# Allegro board DAQ_CONTROLLER.brd
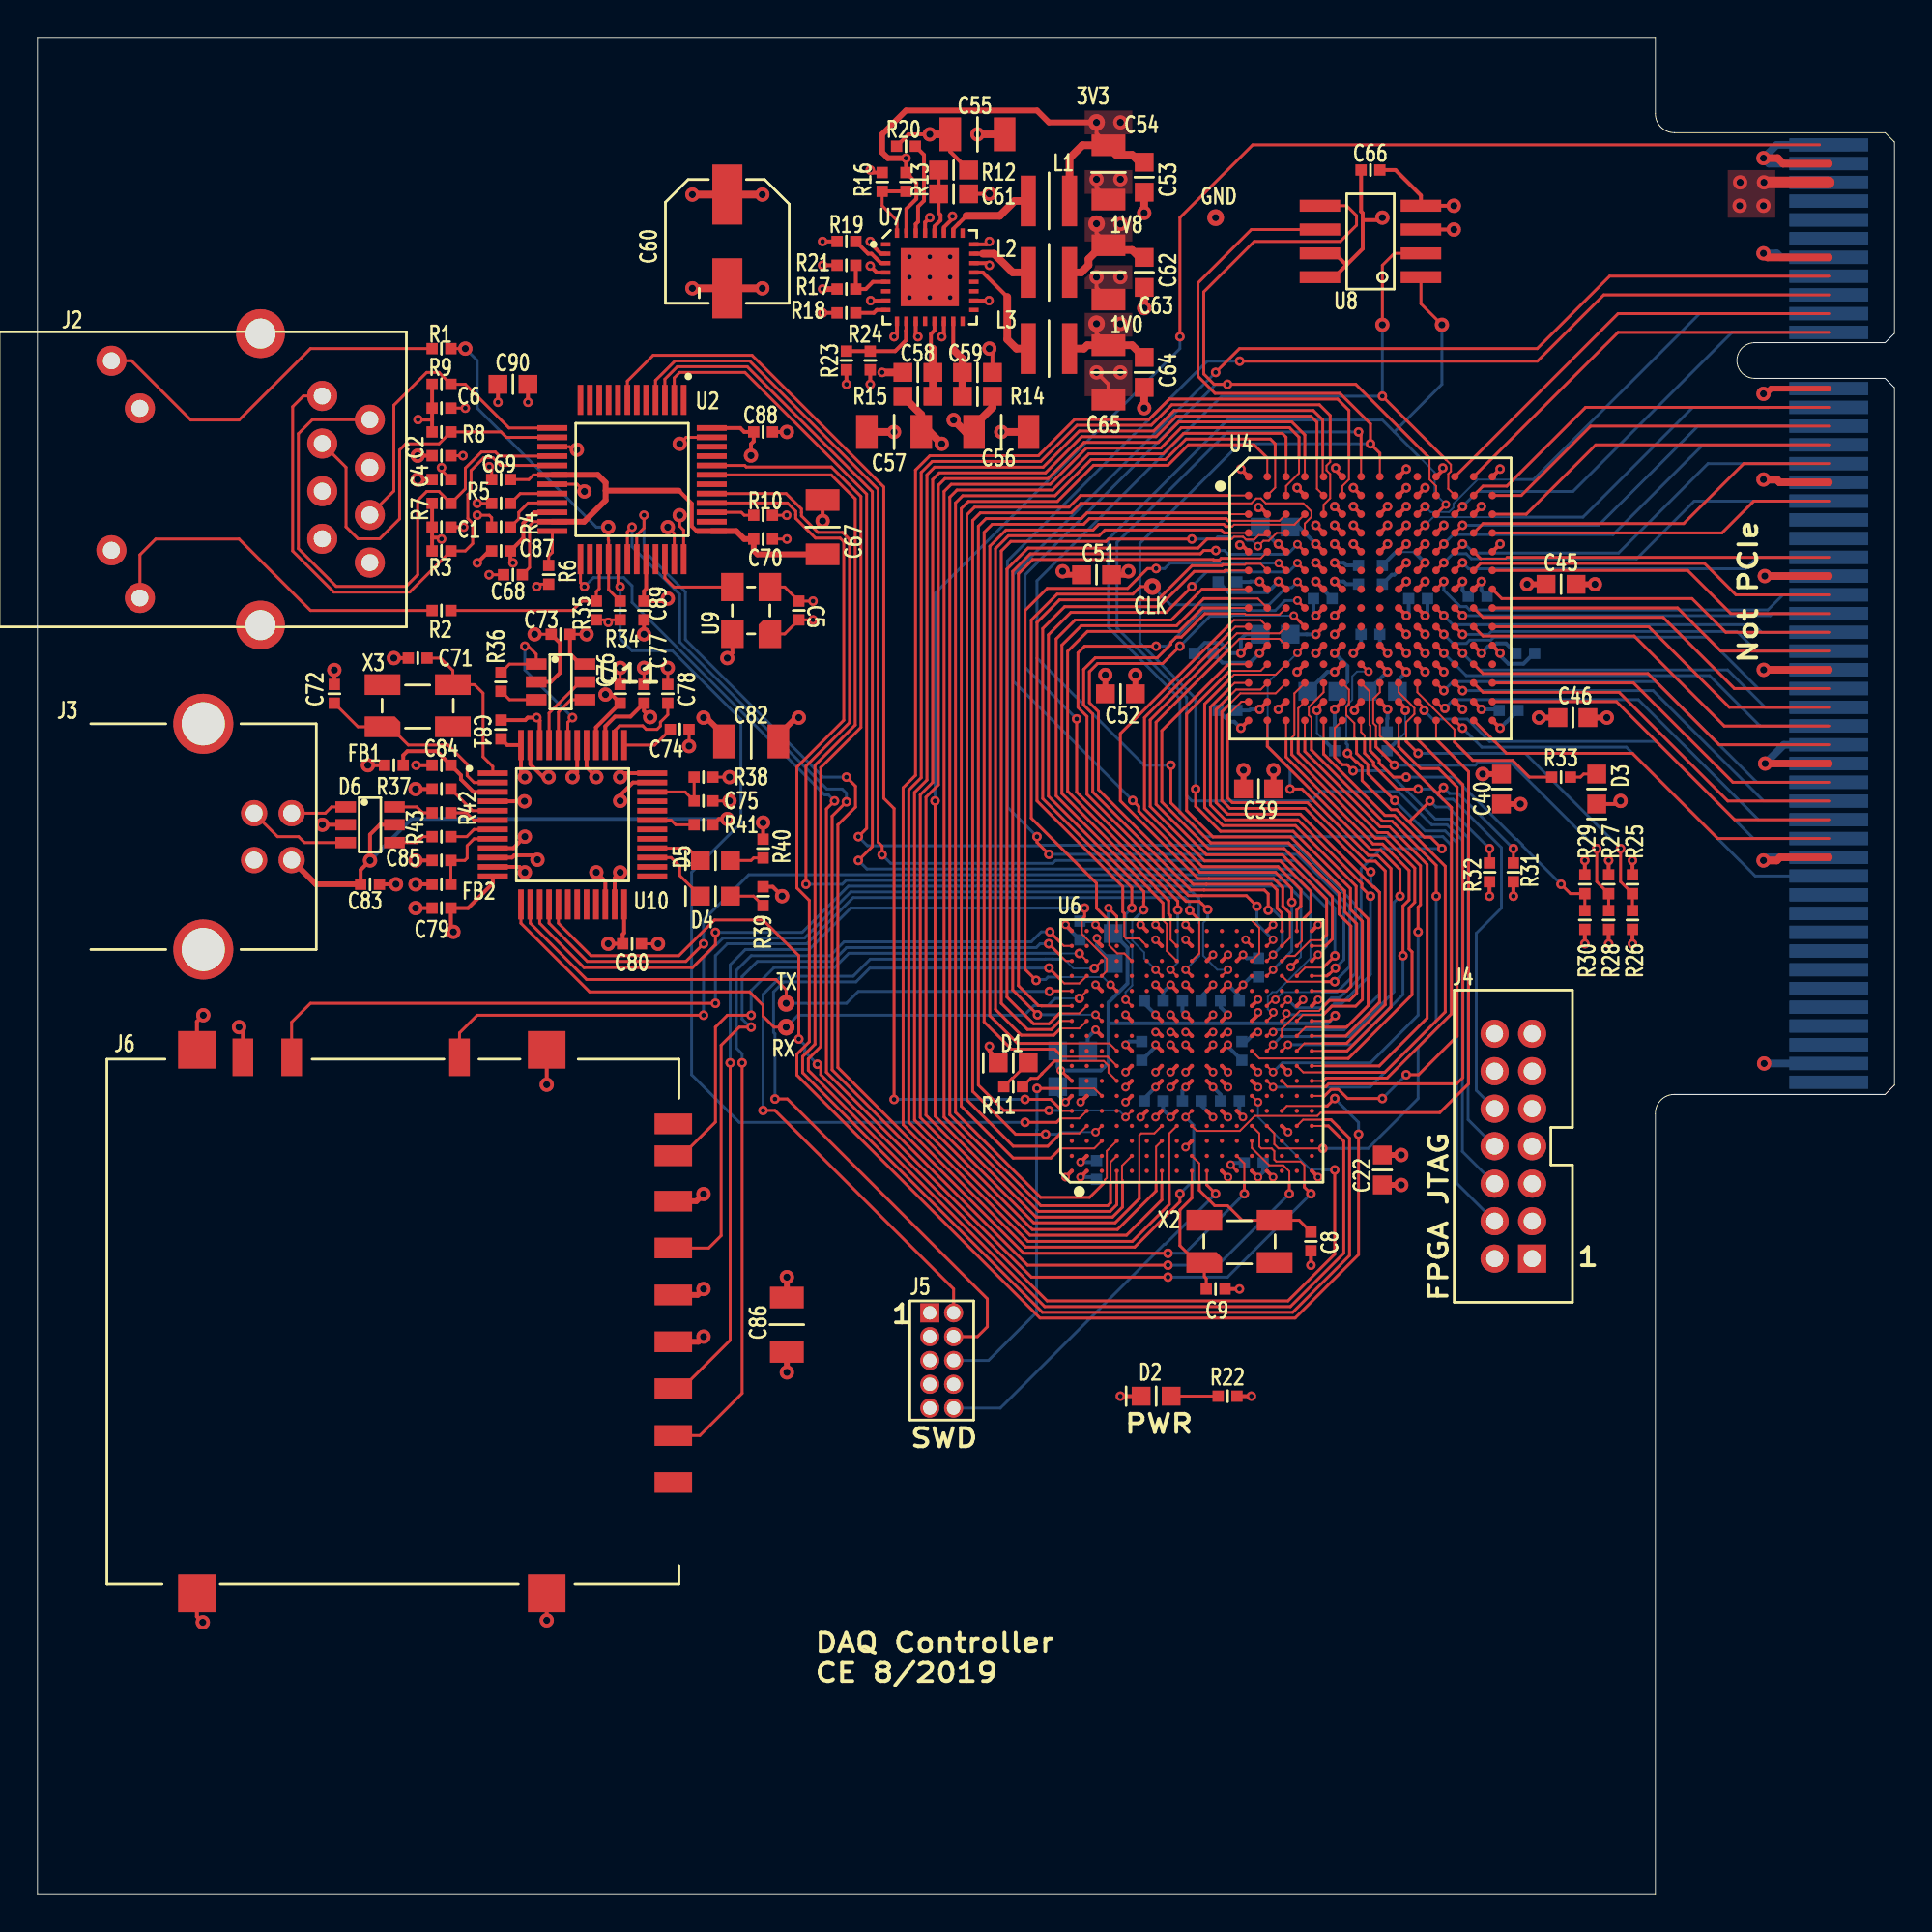
[diagram p0: board, top side]
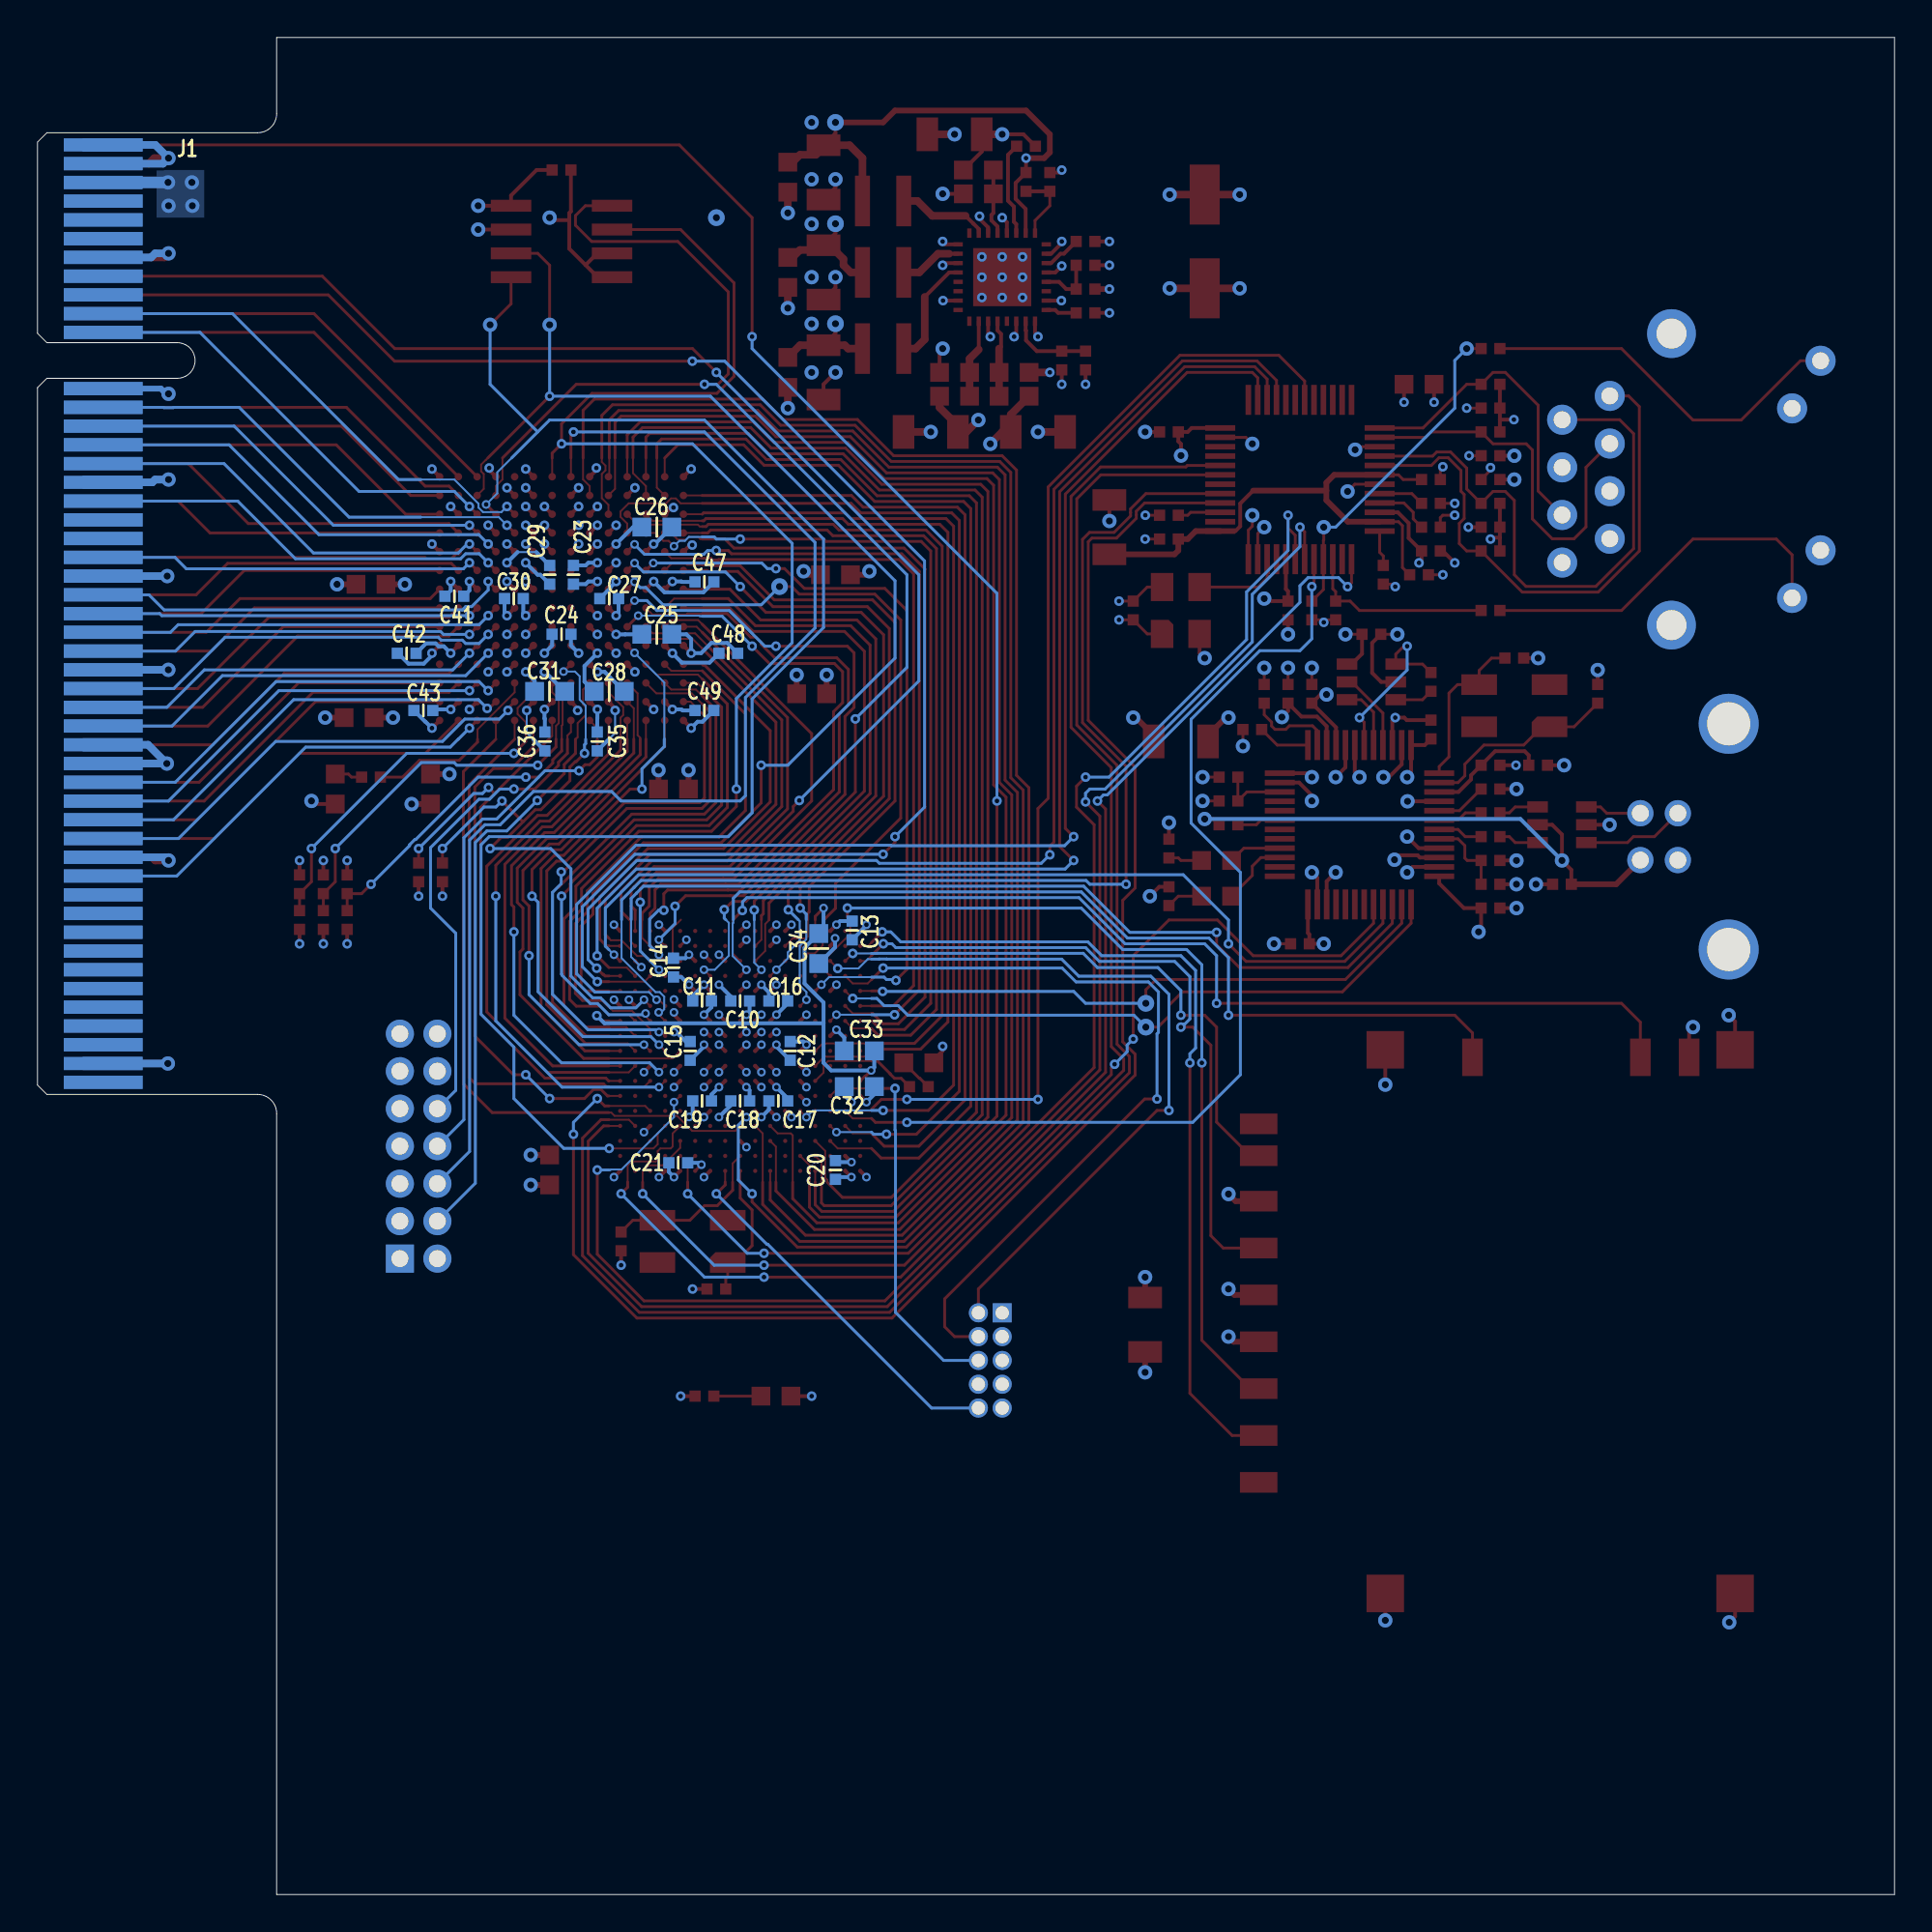
[diagram p1: board, bottom side, seen from below]

Outline 99.01 x 99.06 mm; copper layers: TOP, GND, PWR, BOTTOM. Coordinates in mm from the lower left corner of the outline.
Outline path: 0,99.06 0,0 86.26,0 86.26,41.66 arc(86.56,42.38) 87.28,42.68 98.51,42.68 99.01,43.18 99.01,80.38 98.51,80.88 91.56,80.88 arc(90.61,81.83) 91.56,82.78 98.51,82.78 99.01,83.28 99.01,93.48 98.51,93.98 87.28,93.98 arc(86.56,94.28) 86.26,95 86.26,99.06 0,99.06

## Design rules (mm)
constraint set DEFAULT: min track width 0.152
net group POWER: nets 12V0 AVIN1 AVIN2 AVIN3 VBUS VPHY VPLL

## Placement (name value [footprint] x y rotation side)
C1  0.1uF  [CAP_0402]  21.54 72.94 0 top
C2  0.1uF  [CAP_0402]  21.54 76.75 0 top
C4  0.1uF  [CAP_0402]  21.54 75.48 0 top
C5  0.1uF  [CAP_0402]  40.59 68.49 270 top
C6  0.1uF  [CAP_0402]  21.54 79.29 0 top
C8  8pF  [CAP_0402]  67.89 34.84 90 top
C9  8pF  [CAP_0402]  62.81 32.3 0 top
C10  0.1uF  [CAP_0402]  61.54 47.67 180 bottom
C11  0.1uF  [CAP_0402]  63.58 47.67 180 bottom
C12  0.1uF  [CAP_0402]  58.88 45 270 bottom
C13  0.1uF  [CAP_0402]  55.58 51.43 270 bottom
C14  0.1uF  [CAP_0402]  65.1 49.44 90 bottom
C15  0.1uF  [CAP_0402]  64.21 45 270 bottom
C16  0.1uF  [CAP_0402]  59.51 47.67 180 bottom
C17  0.1uF  [CAP_0402]  59.51 42.33 180 bottom
C18  0.1uF  [CAP_0402]  61.54 42.33 180 bottom
C19  0.1uF  [CAP_0402]  63.58 42.33 180 bottom
C20  0.1uF  [CAP_0402]  56.46 38.65 90 bottom
C21  0.1uF  [CAP_0402]  64.85 39.03 0 bottom
C22  4.7uF  [CAP_0603]  71.7 38.65 90 top
C23  1uF  [CAP_0402]  70.43 70.4 270 bottom
C24  1uF  [CAP_0402]  71.07 67.22 180 bottom
C25  4.7uF  [CAP_0603]  65.99 67.22 180 bottom
C26  4.7uF  [CAP_0603]  65.99 72.94 180 bottom
C27  1uF  [CAP_0402]  68.53 69.13 180 bottom
C28  4.7uF  [CAP_0603]  68.53 64.18 180 bottom
C29  1uF  [CAP_0402]  71.7 70.4 270 bottom
C30  1uF  [CAP_0402]  73.61 69.13 180 bottom
C31  4.7uF  [CAP_0603]  71.7 64.18 180 bottom
C32  4.7uF  [CAP_0603]  55.19 43.09 0 bottom
C33  2.2uF  [CAP_0603]  55.19 45 0 bottom
C34  2.2uF  [CAP_0603]  57.35 50.46 270 bottom
C35  1uF  [CAP_0402]  69.16 61.51 270 bottom
C36  1uF  [CAP_0402]  71.96 61.51 270 bottom
C39  4.7uF  [CAP_0603]  65.1 58.97 0 top
C40  4.7uF  [CAP_0603]  78.05 58.97 270 top
C41  1uF  [CAP_0402]  76.78 69.26 180 bottom
C42  1uF  [CAP_0402]  79.32 66.21 0 bottom
C43  1uF  [CAP_0402]  78.44 63.16 0 bottom
C45  4.7uF  [CAP_0603]  81.23 69.89 0 top
C46  4.7uF  [CAP_0603]  81.86 62.78 0 top
C47  1uF  [CAP_0402]  63.45 70.02 180 bottom
C48  1uF  [CAP_0402]  62.18 66.21 180 bottom
C49  1uF  [CAP_0402]  63.45 63.16 180 bottom
C51  4.7uF  [CAP_0603]  56.46 70.4 0 top
C52  4.7uF  [CAP_0603]  57.73 64.05 0 top
C53  0.1uF  [CAP_0603]  59 91.61 270 top
C54  4.7uF  [CAP_1206]  57.1 91.86 270 top
C55  4.7uF  [CAP_1206]  50.11 93.89 0 top
C56  4.7uF  [CAP_1206]  51.38 78.02 0 top
C57  4.7uF  [CAP_1206]  45.67 78.02 180 top
C58  0.1uF  [CAP_0603]  46.94 81.19 180 top
C59  0.1uF  [CAP_0603]  50.11 81.19 0 top
C60  220uF  [CAP_ALU_SMD_M6P6X8]  36.78 88.18 90 top
C61  0.1uF  [CAP_0603]  48.84 90.72 0 top
C62  0.1uF  [CAP_0603]  59 86.53 270 top
C63  4.7uF  [CAP_1206]  57.1 86.53 270 top
C64  0.1uF  [CAP_0603]  59 81.19 270 top
C65  4.7uF  [CAP_1206]  57.1 81.19 270 top
C66  0.1uF  [CAP_0402]  71.07 91.99 0 top
C67  10uF  [CAP_1206]  41.86 72.94 90 top
C68  0.1uF  [CAP_0402]  25.35 70.4 180 top
C69  0.1uF  [CAP_0402]  24.71 75.48 180 top
C70  0.1uF  [CAP_0402]  38.68 72.3 0 top
C71  27pF  [CAP_0402]  20.27 65.95 180 top
C72  27pF  [CAP_0402]  15.82 64.05 270 top
C73  0.1uF  [CAP_0402]  27.89 67.22 180 top
C74  0.1uF  [CAP_0402]  34.24 62.14 180 top
C75  0.1uF  [CAP_0402]  35.51 58.33 0 top
C76  0.1uF  [CAP_0402]  31.06 64.05 90 top
C77  0.1uF  [CAP_0402]  32.33 64.05 90 top
C78  0.1uF  [CAP_0402]  33.6 64.05 90 top
C79  0.1uF  [CAP_0402]  21.54 52.62 180 top
C80  0.1uF  [CAP_0402]  31.7 50.71 0 top
C81  0.1uF  [CAP_0402]  24.71 62.14 270 top
C82  10uF  [CAP_1206]  38.05 61.51 0 top
C83  0.1uF  [CAP_0402]  17.73 53.89 0 top
C84  0.1uF  [CAP_0402]  21.54 60.24 180 top
C85  0.1uF  [CAP_0402]  21.54 55.16 180 top
C86  10uF  [CAP_1206]  39.95 30.39 90 top
C87  0.1uF  [CAP_0402]  24.71 71.67 180 top
C88  0.1uF  [CAP_0402]  38.68 78.02 0 top
C89  0.1uF  [CAP_0402]  32.33 68.49 270 top
C90  4.7uF  [CAP_0603]  25.35 80.56 0 top
D1  USER  [LED_0603]  52.02 44.36 0 top
D2  PWR  [LED_0603]  59.64 26.58 0 top
D3  USER  [LED_0603]  83.13 58.97 90 top
D4  RX  [LED_0603]  36.14 53.25 0 top
D5  TX  [LED_0603]  36.14 55.16 0 top
D6  USBLC6-2  [SOT-23_6]  17.73 57.06 0 top
FB1  FB_0402  [CAP_0402]  19 60.24 0 top
FB2  FB_0402  [CAP_0402]  21.54 53.89 0 top
J1  DAQ_EDGE_98  [EDGE_PCIE_98]  99.01 81.83 270 bottom
J2  RJ45_MAG_RJMG1B  [MAGJACK_RJMG]  8.84 75.48 270 top
J3  USB_B  [USB_B_UE27BC54130]  8.84 56.43 270 top
J4  XILINX_JTAG  [HDR_2X7_2MM]  78.69 39.92 180 top
J5  SWD_HEADER  [HDR_0P5IN_2X5]  48.21 28.49 0 top
J6  SD_DM1AA  [SD_DM1AA-SF-PEJ]  31.7 42.46 270 top
L1  1uH  [IND_NR3015]  53.92 90.34 0 top
L2  1uH  [IND_NR3015]  53.92 86.53 0 top
L3  1uH  [IND_NR3015]  53.92 82.46 0 top
NOREF  -  []  -119.43 -17.23 0 top
NOREF#2  -  [unnamed#2]  5.08 91.44 0 top
NOREF#3  -  [unnamed#2]  5.08 7.62 0 top
R1  220  [RES_0402]  21.54 82.46 180 top
R2  220  [RES_0402]  21.54 68.49 180 top
R3  49.9  [RES_0402]  21.54 71.67 180 top
R4  2.2K  [RES_0402]  24.71 72.94 0 top
R5  2.2K  [RES_0402]  24.71 74.21 0 top
R6  4.87K  [RES_0402]  27.25 70.4 270 top
R7  49.9  [RES_0402]  21.54 74.21 0 top
R8  49.9  [RES_0402]  21.54 78.02 180 top
R9  49.9  [RES_0402]  21.54 80.56 0 top
R10  2.2K  [RES_0402]  38.68 73.57 0 top
R11  220  [RES_0402]  52.02 43.09 0 top
R12  51  [RES_0603]  48.84 91.99 180 top
R13  309K  [RES_0402]  46.3 91.35 270 top
R14  51  [RES_0603]  50.11 79.92 180 top
R15  51  [RES_0603]  46.94 79.92 0 top
R16  71.5K  [RES_0402]  45.03 91.35 90 top
R17  301K  [RES_0402]  43.13 85.64 0 top
R18  100K  [RES_0402]  43.13 84.37 0 top
R19  100K  [RES_0402]  43.13 88.18 0 top
R20  100K  [RES_0402]  46.3 93.26 0 top
R21  158K  [RES_0402]  43.13 86.91 180 top
R22  220  [RES_0402]  63.45 26.58 0 top
R23  115K  [RES_0402]  43.13 81.83 90 top
R24  187K  [RES_0402]  44.4 81.83 270 top
R25  DNP  [RES_0402]  85.04 53.89 90 top
R26  0  [RES_0402]  85.04 51.98 90 top
R27  DNP  [RES_0402]  83.77 53.89 90 top
R28  0  [RES_0402]  83.77 51.98 90 top
R29  0  [RES_0402]  82.5 53.89 90 top
R30  DNP  [RES_0402]  82.5 51.98 90 top
R31  4.7k  [RES_0402]  78.69 54.52 270 top
R32  4.7k  [RES_0402]  77.42 54.52 270 top
R33  220  [RES_0402]  81.23 59.6 0 top
R34  2.2K  [RES_0402]  31.06 68.49 90 top
R35  2.2K  [RES_0402]  29.79 68.49 270 top
R36  2k  [RES_0402]  24.71 64.68 270 top
R37  12k  [RES_0402]  21.54 58.97 180 top
R38  10k  [RES_0402]  35.51 59.6 180 top
R39  220  [RES_0402]  38.68 53.25 90 top
R40  220  [RES_0402]  38.68 55.79 90 top
R41  33k  [RES_0402]  35.51 57.06 0 top
R42  33  [RES_0402]  21.54 57.7 180 top
R43  33  [RES_0402]  21.54 56.43 180 top
U2  DP83848  [QFP48]  31.7 75.48 270 top
U4  XC7S6_FTGB196  [BGA196_FTGB196]  71.07 69.13 0 top
U6  STM32H750_BGA240  [BGA265_0P8MM_STM32]  61.54 45 90 top
U7  MIC23450  [QFN32_5X5]  47.57 86.27 0 top
U8  MX25L3233FM1  [SOIC8]  71.07 88.18 180 top
U9  50 MHz  [CRYSTAL_3P2X2P5]  38.05 68.49 90 top
U10  FT232H  [QFP48]  28.52 57.06 0 top
U11  93LC56BT-I/OT  [SOT-23_6]  27.89 64.68 0 top
X2  25 MHz  [CRYSTAL_5X3]  64.08 34.84 180 top
X3  12 MHz  [CRYSTAL_5X3]  20.27 63.41 180 top

## Library data of the parts
C1 C2 C4-C6 C8-C36 C39-C43 C45-C49 C51-C59 C61-C90 = CAP NP
C60 = CAP POL
D1-D5 = LED
D6 = USBLC6-2
FB1 FB2 = FB_0402
J1 = DAQ_EDGE_98
J2 = RJ45_MAG_RJMG1B
J3 = USB_B
J4 = XILINX_JTAG
J5 = SWD_HEADER
J6 = SD_DM1AA
L1-L3 = INDUCTOR
R1-R43 = RESISTOR
U2 = DP83848
U4 = XC7S6_FTGB196
U6 = STM32H750_BGA240
U7 = MIC23450
U8 = MX25L3233FM1
U9 = OSC_3P2x2P5_50MHZ
U10 = FT232H
U11 = 93LC56BT-I/OT
X2 X3 = CRYSTAL_5X3_12MHZ

## Footprints (pads in the part's own frame, mm; a bottom-side part is the same pattern mirrored in y, then rotated)
BGA196_FTGB196
  round 0.4 smd: A1(-6.5,6.5) A2(-5.5,6.5) A3(-4.5,6.5) A4(-3.5,6.5) A5(-2.5,6.5) A6(-1.5,6.5) A7(-0.5,6.5) A8(0.5,6.5) A9(1.5,6.5) A10(2.5,6.5) A11(3.5,6.5) A12(4.5,6.5) A13(5.5,6.5) A14(6.5,6.5) B1(-6.5,5.5) B2(-5.5,5.5) B3(-4.5,5.5) B4(-3.5,5.5) B5(-2.5,5.5) B6(-1.5,5.5) B7(-0.5,5.5) B8(0.5,5.5) B9(1.5,5.5) B10(2.5,5.5) B11(3.5,5.5) B12(4.5,5.5) B13(5.5,5.5) B14(6.5,5.5) C1(-6.5,4.5) C2(-5.5,4.5) C3(-4.5,4.5) C4(-3.5,4.5) C5(-2.5,4.5) C6(-1.5,4.5) C7(-0.5,4.5) C8(0.5,4.5) C9(1.5,4.5) C10(2.5,4.5) C11(3.5,4.5) C12(4.5,4.5) C13(5.5,4.5) C14(6.5,4.5) D1(-6.5,3.5) D2(-5.5,3.5) D3(-4.5,3.5) D4(-3.5,3.5) D5(-2.5,3.5) D6(-1.5,3.5) D7(-0.5,3.5) D8(0.5,3.5) D9(1.5,3.5) D10(2.5,3.5) D11(3.5,3.5) D12(4.5,3.5) D13(5.5,3.5) D14(6.5,3.5) E1(-6.5,2.5) E2(-5.5,2.5) E3(-4.5,2.5) E4(-3.5,2.5) E5(-2.5,2.5) E6(-1.5,2.5) E7(-0.5,2.5) E8(0.5,2.5) E9(1.5,2.5) E10(2.5,2.5) E11(3.5,2.5) E12(4.5,2.5) E13(5.5,2.5) E14(6.5,2.5) F1(-6.5,1.5) F2(-5.5,1.5) F3(-4.5,1.5) F4(-3.5,1.5) F5(-2.5,1.5) F6(-1.5,1.5) F7(-0.5,1.5) F8(0.5,1.5) F9(1.5,1.5) F10(2.5,1.5) F11(3.5,1.5) F12(4.5,1.5) F13(5.5,1.5) F14(6.5,1.5) G1(-6.5,0.5) G2(-5.5,0.5) G3(-4.5,0.5) G4(-3.5,0.5) G5(-2.5,0.5) G6(-1.5,0.5) G7(-0.5,0.5) G8(0.5,0.5) G9(1.5,0.5) G10(2.5,0.5) G11(3.5,0.5) G12(4.5,0.5) G13(5.5,0.5) G14(6.5,0.5) H1(-6.5,-0.5) H2(-5.5,-0.5) H3(-4.5,-0.5) H4(-3.5,-0.5) H5(-2.5,-0.5) H6(-1.5,-0.5) H7(-0.5,-0.5) H8(0.5,-0.5) H9(1.5,-0.5) H10(2.5,-0.5) H11(3.5,-0.5) H12(4.5,-0.5) H13(5.5,-0.5) H14(6.5,-0.5) J1(-6.5,-1.5) J2(-5.5,-1.5) J3(-4.5,-1.5) J4(-3.5,-1.5) J5(-2.5,-1.5) J6(-1.5,-1.5) J7(-0.5,-1.5) J8(0.5,-1.5) J9(1.5,-1.5) J10(2.5,-1.5) J11(3.5,-1.5) J12(4.5,-1.5) J13(5.5,-1.5) J14(6.5,-1.5) K1(-6.5,-2.5) K2(-5.5,-2.5) K3(-4.5,-2.5) K4(-3.5,-2.5) K5(-2.5,-2.5) K6(-1.5,-2.5) K7(-0.5,-2.5) K8(0.5,-2.5) K9(1.5,-2.5) K10(2.5,-2.5) K11(3.5,-2.5) K12(4.5,-2.5) K13(5.5,-2.5) K14(6.5,-2.5) L1(-6.5,-3.5) L2(-5.5,-3.5) L3(-4.5,-3.5) L4(-3.5,-3.5) L5(-2.5,-3.5) L6(-1.5,-3.5) L7(-0.5,-3.5) L8(0.5,-3.5) L9(1.5,-3.5) L10(2.5,-3.5) L11(3.5,-3.5) L12(4.5,-3.5) L13(5.5,-3.5) L14(6.5,-3.5) M1(-6.5,-4.5) M2(-5.5,-4.5) M3(-4.5,-4.5) M4(-3.5,-4.5) M5(-2.5,-4.5) M6(-1.5,-4.5) M7(-0.5,-4.5) M8(0.5,-4.5) M9(1.5,-4.5) M10(2.5,-4.5) M11(3.5,-4.5) M12(4.5,-4.5) M13(5.5,-4.5) M14(6.5,-4.5) N1(-6.5,-5.5) N2(-5.5,-5.5) N3(-4.5,-5.5) N4(-3.5,-5.5) N5(-2.5,-5.5) N6(-1.5,-5.5) N7(-0.5,-5.5) N8(0.5,-5.5) N9(1.5,-5.5) N10(2.5,-5.5) N11(3.5,-5.5) N12(4.5,-5.5) N13(5.5,-5.5) N14(6.5,-5.5) P1(-6.5,-6.5) P2(-5.5,-6.5) P3(-4.5,-6.5) P4(-3.5,-6.5) P5(-2.5,-6.5) P6(-1.5,-6.5) P7(-0.5,-6.5) P8(0.5,-6.5) P9(1.5,-6.5) P10(2.5,-6.5) P11(3.5,-6.5) P12(4.5,-6.5) P13(5.5,-6.5) P14(6.5,-6.5)
BGA265_0P8MM_STM32
  round 0.225 smd: A1(-6.4,6.4) A2(-5.6,6.4) A3(-4.8,6.4) A4(-4,6.4) A5(-3.2,6.4) A6(-2.4,6.4) A7(-1.6,6.4) A8(-0.8,6.4) A9(0,6.4) A10(0.8,6.4) A11(1.6,6.4) A12(2.4,6.4) A13(3.2,6.4) A14(4,6.4) A15(4.8,6.4) A16(5.6,6.4) A17(6.4,6.4) B1(-6.4,5.6) B2(-5.6,5.6) B3(-4.8,5.6) B4(-4,5.6) B5(-3.2,5.6) B6(-2.4,5.6) B7(-1.6,5.6) B8(-0.8,5.6) B9(0,5.6) B10(0.8,5.6) B11(1.6,5.6) B12(2.4,5.6) B13(3.2,5.6) B14(4,5.6) B15(4.8,5.6) B16(5.6,5.6) B17(6.4,5.6) C1(-6.4,4.8) C2(-5.6,4.8) C3(-4.8,4.8) C4(-4,4.8) C5(-3.2,4.8) C6(-2.4,4.8) C7(-1.6,4.8) C8(-0.8,4.8) C9(0,4.8) C10(0.8,4.8) C11(1.6,4.8) C12(2.4,4.8) C13(3.2,4.8) C14(4,4.8) C15(4.8,4.8) C16(5.6,4.8) C17(6.4,4.8) D1(-6.4,4) D2(-5.6,4) D3(-4.8,4) D4(-4,4) D5(-3.2,4) D6(-2.4,4) D7(-1.6,4) D8(-0.8,4) D9(0,4) D10(0.8,4) D11(1.6,4) D12(2.4,4) D13(3.2,4) D14(4,4) D15(4.8,4) D16(5.6,4) D17(6.4,4) E1(-6.4,3.2) E2(-5.6,3.2) E3(-4.8,3.2) E4(-4,3.2) E5(-3.2,3.2) E6(-2.4,3.2) E7(-1.6,3.2) E8(-0.8,3.2) E9(0,3.2) E10(0.8,3.2) E11(1.6,3.2) E12(2.4,3.2) E13(3.2,3.2) E14(4,3.2) E15(4.8,3.2) E16(5.6,3.2) E17(6.4,3.2) F1(-6.4,2.4) F2(-5.6,2.4) F3(-4.8,2.4) F4(-4,2.4) F5(-3.2,2.4) F13(3.2,2.4) F14(4,2.4) F15(4.8,2.4) F16(5.6,2.4) F17(6.4,2.4) G1(-6.4,1.6) G2(-5.6,1.6) G3(-4.8,1.6) G4(-4,1.6) G5(-3.2,1.6) G7(-1.6,1.6) G8(-0.8,1.6) G9(0,1.6) G10(0.8,1.6) G11(1.6,1.6) G13(3.2,1.6) G14(4,1.6) G15(4.8,1.6) G16(5.6,1.6) G17(6.4,1.6) H1(-6.4,0.8) H2(-5.6,0.8) H3(-4.8,0.8) H4(-4,0.8) H5(-3.2,0.8) H7(-1.6,0.8) H8(-0.8,0.8) H9(0,0.8) H10(0.8,0.8) H11(1.6,0.8) H13(3.2,0.8) H14(4,0.8) H15(4.8,0.8) H16(5.6,0.8) H17(6.4,0.8) J1(-6.4,0) J2(-5.6,0) J3(-4.8,0) J4(-4,0) J5(-3.2,0) J7(-1.6,0) J8(-0.8,0) J9(0,0) J10(0.8,0) J11(1.6,0) J13(3.2,0) J14(4,0) J15(4.8,0) J16(5.6,0) J17(6.4,0) K1(-6.4,-0.8) K2(-5.6,-0.8) K3(-4.8,-0.8) K4(-4,-0.8) K5(-3.2,-0.8) K7(-1.6,-0.8) K8(-0.8,-0.8) K9(0,-0.8) K10(0.8,-0.8) K11(1.6,-0.8) K13(3.2,-0.8) K14(4,-0.8) K15(4.8,-0.8) K16(5.6,-0.8) K17(6.4,-0.8) L1(-6.4,-1.6) L2(-5.6,-1.6) L3(-4.8,-1.6) L4(-4,-1.6) L5(-3.2,-1.6) L7(-1.6,-1.6) L8(-0.8,-1.6) L9(0,-1.6) L10(0.8,-1.6) L11(1.6,-1.6) L13(3.2,-1.6) L14(4,-1.6) L15(4.8,-1.6) L16(5.6,-1.6) L17(6.4,-1.6) M1(-6.4,-2.4) M2(-5.6,-2.4) M3(-4.8,-2.4) M4(-4,-2.4) M5(-3.2,-2.4) M13(3.2,-2.4) M14(4,-2.4) M15(4.8,-2.4) M16(5.6,-2.4) M17(6.4,-2.4) N1(-6.4,-3.2) N2(-5.6,-3.2) N3(-4.8,-3.2) N4(-4,-3.2) N5(-3.2,-3.2) N6(-2.4,-3.2) N7(-1.6,-3.2) N8(-0.8,-3.2) N9(0,-3.2) N10(0.8,-3.2) N11(1.6,-3.2) N12(2.4,-3.2) N13(3.2,-3.2) N14(4,-3.2) N15(4.8,-3.2) N16(5.6,-3.2) N17(6.4,-3.2) P1(-6.4,-4) P2(-5.6,-4) P3(-4.8,-4) P4(-4,-4) P5(-3.2,-4) P6(-2.4,-4) P7(-1.6,-4) P8(-0.8,-4) P9(0,-4) P10(0.8,-4) P11(1.6,-4) P12(2.4,-4) P13(3.2,-4) P14(4,-4) P15(4.8,-4) P16(5.6,-4) P17(6.4,-4) R1(-6.4,-4.8) R2(-5.6,-4.8) R3(-4.8,-4.8) R4(-4,-4.8) R5(-3.2,-4.8) R6(-2.4,-4.8) R7(-1.6,-4.8) R8(-0.8,-4.8) R9(0,-4.8) R10(0.8,-4.8) R11(1.6,-4.8) R12(2.4,-4.8) R13(3.2,-4.8) R14(4,-4.8) R15(4.8,-4.8) R16(5.6,-4.8) R17(6.4,-4.8) T1(-6.4,-5.6) T2(-5.6,-5.6) T3(-4.8,-5.6) T4(-4,-5.6) T5(-3.2,-5.6) T6(-2.4,-5.6) T7(-1.6,-5.6) T8(-0.8,-5.6) T9(0,-5.6) T10(0.8,-5.6) T11(1.6,-5.6) T12(2.4,-5.6) T13(3.2,-5.6) T14(4,-5.6) T15(4.8,-5.6) T16(5.6,-5.6) T17(6.4,-5.6) U1(-6.4,-6.4) U2(-5.6,-6.4) U3(-4.8,-6.4) U4(-4,-6.4) U5(-3.2,-6.4) U6(-2.4,-6.4) U7(-1.6,-6.4) U8(-0.8,-6.4) U9(0,-6.4) U10(0.8,-6.4) U11(1.6,-6.4) U12(2.4,-6.4) U13(3.2,-6.4) U14(4,-6.4) U15(4.8,-6.4) U16(5.6,-6.4) U17(6.4,-6.4)
CAP_0402
  rect 0.6x0.6 smd: 1(-0.5,0) 2(0.5,0)
CAP_0603
  rect 1x1 smd: 1(-0.8,0) 2(0.8,0)
CAP_1206
  rect 1.15x1.8 smd: 1(-1.45,0) 2(1.45,0)
CAP_ALU_SMD_M6P6X8
  rect 3.2x1.6 smd: 1(-2.5,0) 2(2.5,0)
CRYSTAL_3P2X2P5
  custom 1.5x1.2 smd: 1(-1.25,-1)
  rect 1.5x1.2 smd: 2(1.25,-1) 3(1.25,1) 4(-1.25,1)
CRYSTAL_5X3
  custom 1.9x1.1 smd: 1(1.875,1.125)
  rect 1.9x1.1 smd: 2(-1.875,1.125) 3(-1.875,-1.125) 4(1.875,-1.125)
EDGE_PCIE_98
  rect 0.7x3.2 smd: A1(-11.5,4) B17(6.5,4) B31(20.5,4) B48(37.5,4)
  rect 0.7x4.2 smd: A2(-10.5,3.5) A3(-9.5,3.5) A4(-8.5,3.5) A5(-7.5,3.5) A6(-6.5,3.5) A7(-5.5,3.5) A8(-4.5,3.5) A9(-3.5,3.5) A10(-2.5,3.5) A11(-1.5,3.5) A12(1.5,3.5) A13(2.5,3.5) A14(3.5,3.5) A15(4.5,3.5) A16(5.5,3.5) A17(6.5,3.5) A18(7.5,3.5) A19(8.5,3.5) A20(9.5,3.5) A21(10.5,3.5) A22(11.5,3.5) A23(12.5,3.5) A24(13.5,3.5) A25(14.5,3.5) A26(15.5,3.5) A27(16.5,3.5) A28(17.5,3.5) A29(18.5,3.5) A30(19.5,3.5) A31(20.5,3.5) A32(21.5,3.5) A33(22.5,3.5) A34(23.5,3.5) A35(24.5,3.5) A36(25.5,3.5) A37(26.5,3.5) A38(27.5,3.5) A39(28.5,3.5) A40(29.5,3.5) A41(30.5,3.5) A42(31.5,3.5) A43(32.5,3.5) A44(33.5,3.5) A45(34.5,3.5) A46(35.5,3.5) A47(36.5,3.5) A48(37.5,3.5) A49(38.5,3.5) B1(-11.5,3.5) B2(-10.5,3.5) B3(-9.5,3.5) B4(-8.5,3.5) B5(-7.5,3.5) B6(-6.5,3.5) B7(-5.5,3.5) B8(-4.5,3.5) B9(-3.5,3.5) B10(-2.5,3.5) B11(-1.5,3.5) B12(1.5,3.5) B13(2.5,3.5) B14(3.5,3.5) B15(4.5,3.5) B16(5.5,3.5) B18(7.5,3.5) B19(8.5,3.5) B20(9.5,3.5) B21(10.5,3.5) B22(11.5,3.5) B23(12.5,3.5) B24(13.5,3.5) B25(14.5,3.5) B26(15.5,3.5) B27(16.5,3.5) B28(17.5,3.5) B29(18.5,3.5) B30(19.5,3.5) B32(21.5,3.5) B33(22.5,3.5) B34(23.5,3.5) B35(24.5,3.5) B36(25.5,3.5) B37(26.5,3.5) B38(27.5,3.5) B39(28.5,3.5) B40(29.5,3.5) B41(30.5,3.5) B42(31.5,3.5) B43(32.5,3.5) B44(33.5,3.5) B45(34.5,3.5) B46(35.5,3.5) B47(36.5,3.5) B49(38.5,3.5)
HDR_0P5IN_2X5
  rect 1.016x1.016 hole 0.711: 1(-0.635,2.54)
  round 1.016 hole 0.711: 2(0.635,2.54) 3(-0.635,1.27) 4(0.635,1.27) 5(-0.635,0) 6(0.635,0) 7(-0.635,-1.27) 8(0.635,-1.27) 9(-0.635,-2.54) 10(0.635,-2.54)
HDR_2X7_2MM
  rect 1.5x1.5 hole 0.9: 1(-1,6)
  round 1.5 hole 0.9: 2(1,6) 3(-1,4) 4(1,4) 5(-1,2) 6(1,2) 7(-1,0) 8(1,0) 9(-1,-2) 10(1,-2) 11(-1,-4) 12(1,-4) 13(-1,-6) 14(1,-6)
IND_NR3015
  rect 0.8x2.7 smd: 1(-1.1,0) 2(1.1,0)
LED_0603
  rect 1x1 smd: 1(-0.8,0) 2(0.8,0)
MAGJACK_RJMG
  round 0 hole 3.25 unplated: (-5.725,0) (5.705,0)
  round 1.6 hole 0.9: 1(-4.46,6.34) 2(-3.19,8.88) 3(-1.92,6.34) 4(-0.65,8.88) 5(0.62,6.34) 6(1.89,8.88) 7(3.16,6.34) 8(4.43,8.88) 11(6.315,-3.38) 12(3.775,-4.9) 13(-3.795,-3.38) 14(-6.335,-4.9)
  round 2.6 hole 1.6: 9(-7.785,3.05) 10(7.765,3.05)
QFN32_5X5
  rect 0.5x0.23 smd: 1(-2.35,1.75) 2(-2.35,1.25) 3(-2.35,0.75) 4(-2.35,0.25) 5(-2.35,-0.25) 6(-2.35,-0.75) 7(-2.35,-1.25) 8(-2.35,-1.75) 17(2.35,-1.75) 18(2.35,-1.25) 19(2.35,-0.75) 20(2.35,-0.25) 21(2.35,0.25) 22(2.35,0.75) 23(2.35,1.25) 24(2.35,1.75)
  rect 0.23x0.5 smd: 9(-1.75,-2.35) 10(-1.25,-2.35) 11(-0.75,-2.35) 12(-0.25,-2.35) 13(0.25,-2.35) 14(0.75,-2.35) 15(1.25,-2.35) 16(1.75,-2.35) 25(1.75,2.35) 26(1.25,2.35) 27(0.75,2.35) 28(0.25,2.35) 29(-0.25,2.35) 30(-0.75,2.35) 31(-1.25,2.35) 32(-1.75,2.35)
  rect 3.1x3.1 smd: 33(0,0)
QFP48
  rect 1.6x0.3 smd: 1(-4.25,2.75) 2(-4.25,2.25) 3(-4.25,1.75) 4(-4.25,1.25) 5(-4.25,0.75) 6(-4.25,0.25) 7(-4.25,-0.25) 8(-4.25,-0.75) 9(-4.25,-1.25) 10(-4.25,-1.75) 11(-4.25,-2.25) 12(-4.25,-2.75) 25(4.25,-2.75) 26(4.25,-2.25) 27(4.25,-1.75) 28(4.25,-1.25) 29(4.25,-0.75) 30(4.25,-0.25) 31(4.25,0.25) 32(4.25,0.75) 33(4.25,1.25) 34(4.25,1.75) 35(4.25,2.25) 36(4.25,2.75)
  rect 0.3x1.6 smd: 13(-2.75,-4.25) 14(-2.25,-4.25) 15(-1.75,-4.25) 16(-1.25,-4.25) 17(-0.75,-4.25) 18(-0.25,-4.25) 19(0.25,-4.25) 20(0.75,-4.25) 21(1.25,-4.25) 22(1.75,-4.25) 23(2.25,-4.25) 24(2.75,-4.25) 37(2.75,4.25) 38(2.25,4.25) 39(1.75,4.25) 40(1.25,4.25) 41(0.75,4.25) 42(0.25,4.25) 43(-0.25,4.25) 44(-0.75,4.25) 45(-1.25,4.25) 46(-1.75,4.25) 47(-2.25,4.25) 48(-2.75,4.25)
RES_0402
  rect 0.6x0.6 smd: 1(-0.5,0) 2(0.5,0)
RES_0603
  rect 1x1 smd: 1(-0.8,0) 2(0.8,0)
SD_DM1AA-SF-PEJ
  round 0 hole 1.3 unplated: (0,0) (22.4,0)
  rect 1.1x2 smd: 1(17.975,2.2) 2(15.475,2.2) 3(12.975,2.2) 4(10.475,2.2) 5(7.975,2.2) 6(5.475,2.2) 7(3.05,2.2) 8(1.35,2.2) 9(20.475,2.2)
  rect 2x1.1 smd: 10(-2.2,-9.2) 11(-2.2,-18.15) 12(-2.2,-20.75)
  rect 2x2 smd: 13(-2.6,-4.55) 14(-2.6,-23.2) 15(26.4,-23.2) 16(26.4,-4.55)
SOIC8
  rect 2.159x0.635 smd: 1(-2.692,1.905) 2(-2.692,0.635) 3(-2.692,-0.635) 4(-2.692,-1.905) 5(2.692,-1.905) 6(2.692,-0.635) 7(2.692,0.635) 8(2.692,1.905)
SOT-23_6
  rect 1.1x0.6 smd: 1(-1.3,0.95) 2(-1.3,0) 3(-1.3,-0.95) 4(1.3,-0.95) 5(1.3,0) 6(1.3,0.95)
unnamed#2
  round 0 hole 3.6: (0,0)
USB_B_UE27BC54130
  round 1.4 hole 0.9: 1(1.25,4.71) 2(-1.25,4.71) 3(-1.25,2.71) 4(1.25,2.71)
  round 3.2 hole 2.3: 5(-6.02,0) 6(6.02,0)

## Nets
3V3: J1.A4 J1.B4
12V0: J1.A5 J1.A6 J1.A19 J1.A20 J1.B5 J1.B6 J1.B19 J1.B20
AVIN1: C61.1 R12.2 U7.28
AVIN2: C59.1 R14.2 U7.15
AVIN3: C58.1 R15.2 U7.13
GND: C1.2 C2.2 C4.2 C5.1 C6.2 C8.1 C9.2 C10.2 C11.2 C12.2 C13.2 C14.2 C15.2 C16.2 C17.2 C18.2 C19.2 C20.2 C21.2 C22.2 C23.2 C24.2 C25.2 C26.2 C27.2 C28.2 C29.2 C30.2 C31.2 C32.2 C33.2 C34.2 C35.2 C36.2 C39.2 C40.2 C41.2 C42.2 C43.2 C45.2 C46.2 C47.2 C48.2 C49.2 C51.2 C52.2 C53.2 C54.2 C55.2 C56.2 C57.2 C58.2 C59.2 C60.2 C61.2 C62.2 C63.2 C64.2 C65.2 C66.2 C67.2 C68.2 C69.2 C70.2 C71.2 C72.1 C73.2 C74.1 C75.2 C76.2 C77.2 C78.2 C79.2 C80.2 C81.2 C82.2 C83.2 C84.2 C85.2 C86.1 C87.2 C88.2 C89.2 C90.2 D1.1(CATHODE) D2.1(CATHODE) D3.1(CATHODE) D6.2 J1.A2 J1.A7 J1.A12 J1.A17 J1.A22 J1.A27 J1.A32 J1.A37 J1.B1 J1.B2 J1.B7 J1.B12 J1.B17 J1.B22 J1.B27 J1.B31 J1.B32 J1.B37 J1.B48 J2.8 J2.9 J2.10 J2.12(YEL_C) J2.13 J3.4 J3.5 J3.6(SH2) J4.3 J4.5 J4.7 J4.9 J4.11 J4.13 J5.3 J5.5 J5.9 J6.3 J6.6 J6.12 J6.13 J6.14 J6.15 J6.16 R6.2 R16.2 R21.2 R24.2 R26.1 R28.1 R30.1 R34.1 R35.2 R37.2 U2.15 U2.19 U2.35 U2.36 U2.47 U4.A1 U4.A6 U4.A9 U4.A11 U4.A14 U4.B4 U4.B7 U4.B9 U4.B10 U4.C2 U4.C6 U4.C7 U4.C8 U4.C9 U4.C13 U4.D5 U4.D7 U4.D9 U4.D11 U4.E1 U4.E3 U4.E6 U4.E8 U4.E10 U4.E14 U4.F5 U4.F9 U4.G3 U4.G6 U4.G10 U4.G12 U4.H5 U4.H9 U4.J6 U4.J10 U4.K1 U4.K5 U4.K7 U4.K9 U4.K14 U4.L4 U4.L6 U4.L8 U4.L10 U4.L11 U4.N3 U4.N5 U4.N9 U4.N12 U4.P1 U4.P14 U6.A1 U6.A17 U6.B2 U6.B6 U6.C10 U6.C13 U6.C16 U6.E8 U6.G7 U6.G8 U6.G9 U6.G10 U6.G11 U6.G16 U6.H7 U6.H8 U6.H9 U6.H10 U6.H11 U6.J3 U6.J7 U6.J8 U6.J9 U6.J10 U6.J11 U6.J16 U6.J17 U6.K7 U6.K8 U6.K9 U6.K10 U6.K11 U6.K15 U6.L7 U6.L8 U6.L9 U6.L10 U6.L11 U6.L15 U6.M15 U6.N1 U6.N16 U6.P1 U6.R4 U6.R8 U6.T12 U6.U1 U6.U17 U7.2 U7.7 U7.11 U7.18 U7.22 U7.24 U7.33 U8.4 U9.2 U10.4 U10.9 U10.10 U10.11 U10.22 U10.23 U10.35 U10.36 U10.41 U10.42 U10.47 U10.48 U11.2
VBUS: C83.1 D6.5(VCC) J3.1 R41.2
VCC_1V0: C23.1 C24.1 C25.1 C26.1 C27.1 C28.1 C64.1 C65.1 L3.2 R23.1 U4.D6 U4.D8 U4.E5 U4.E7 U4.E9 U4.F6 U4.G5 U4.G9 U4.H6 U4.J5 U4.J9 U4.K6 U4.K8 U7.9
VCC_1V8: C29.1 C30.1 C31.1 C62.1 C63.1 L2.2 R17.1 U4.F10 U4.H10 U4.K10 U4.L9 U7.4
VCC_3V3: C1.1 C2.1 C4.1 C5.2 C6.1 C10.1 C11.1 C12.1 C13.1 C14.1 C15.1 C16.1 C17.1 C18.1 C19.1 C20.1 C21.1 C22.1 C32.1 C35.1 C36.1 C39.1 C40.1 C41.1 C42.1 C43.1 C45.1 C46.1 C47.1 C48.1 C49.1 C51.1 C52.1 C53.1 C54.1 C66.1 C73.1 C76.1 C77.1 C79.1 C80.1 C81.1 C82.1 C86.2 C87.1 C88.1 C89.1 C90.1 FB1.1 FB2.1 J2.4 J2.5 J4.2(VREF) J5.1(VTREF) J6.4 L1.2 R3.2 R4.1 R5.1 R7.1 R8.2 R9.1 R10.2 R13.1 R22.2 R25.2 R27.2 R29.2 R31.2 R32.2 R38.1 R39.2 R40.2 U2.22 U2.32 U2.48 U4.G2 U4.G13 U4.K2 U4.K13 U4.N2(VCCO_34#N2) U4.N6 U4.N7 U4.N8 U4.N13 U6.A6 U6.B1 U6.C17 U6.E6 U6.E7(PDR_ON) U6.E9 U6.E11 U6.F5 U6.F17 U6.G5 U6.G13 U6.G17 U6.H5 U6.H13 U6.J13 U6.K5 U6.K13 U6.L1 U6.L5 U6.L13 U6.M1 U6.M5 U6.M13 U6.N7 U6.N8 U6.N10 U6.N11 U6.N12 U6.P17 U6.U12 U7.31 U8.3(W\P\/SIO2) U8.7 U8.8 U9.1 U9.4(VCC) U10.12 U10.24 U10.39 U10.40(VREGIN) U10.46 U11.6(VCC)
VCC_5V0: C55.1 C56.1 C57.1 C60.1 J1.A3 J1.B3 R12.1 R14.1 R15.1 R18.1 R19.1 R20.1 U7.14 U7.27 U7.29
CFG_CLK: U4.A8 U6.T11 U8.6
CFG_CS: U4.C11 U6.P4 U8.1
CFG_MISO: U4.B12 U6.U13 U8.2
CFG_MOSI: U4.B11 U6.L14 U8.5
CS0: J1.B36 U4.N10
CS1: J1.B29 U4.K12
CS2: J1.B23 U4.G11
CS3: J1.B14 U4.D12
CS4: J1.A14 U4.B14
CS5: J1.A23 U4.F13
CS6: J1.A29 U4.J14
CS7: J1.A35 U4.N14
ETH_PWR_DN: U2.7 U6.A5
ETH_RESET: U2.29 U6.B5
FB1: R13.2 R16.1 U7.32
FB2: R17.2 R21.1 U7.5
FB3: R23.2 R24.1 U7.10
FMC_A0: U4.A4 U6.G4
FMC_A1: U4.B5 U6.G3
FMC_A2: U4.A5 U6.G1
FMC_A3: U4.C5 U6.H4
FMC_A4: U4.B6 U6.J5
FMC_A5: U4.P11 U6.J4
FMC_A6: U4.P10 U6.R7
FMC_A7: U4.M5 U6.P7
FMC_A8: U4.N4 U6.P8
FMC_A9: U4.P3 U6.R9
FMC_A10: U4.P5 U6.T8
FMC_A11: U4.P4 U6.U8
FMC_A12: U4.H2 U6.H16
FMC_A13: U4.G1 U6.H15
FMC_A14: U4.H1 U6.H14
FMC_A15: U4.F4 U6.G14
FMC_A16: U4.K3 U6.R15
FMC_A17: U4.J2 U6.R16
FMC_A18: U4.J4 U6.R17
FMC_A19: U4.B2 U6.D3
FMC_A20: U4.A3 U6.D2
FMC_A21: U4.B3 U6.D1
FMC_A22: U4.C1 U6.E5
FMC_A23: U4.A2 U6.C3
FMC_A24: U4.C4 U6.D9
FMC_A25: U4.C3 U6.D8
FMC_CLK: U4.D2 U6.B12
FMC_D0: U4.H4 U6.P16
FMC_D1: U4.H3 U6.P15
FMC_D2: U4.F3 U6.D13
FMC_D3: U4.F1 U6.E12
FMC_D4: U4.K4 U6.U9
FMC_D5: U4.N1 U6.T9
FMC_D6: U4.P2 U6.P9
FMC_D7: U4.M4 U6.N9
FMC_D8: U4.M3 U6.P10
FMC_D9: U4.L2 U6.R10
FMC_D10: U4.L3 U6.T10
FMC_D11: U4.M2 U6.U10
FMC_D12: U4.M1 U6.R11
FMC_D13: U4.L1 U6.U16
FMC_D14: U4.J1 U6.T17
FMC_D15: U4.J3 U6.T16
FMC_INT: U4.F2 U6.F16
FMC_NBL0: U4.D4 U6.C4
FMC_NBL1: U4.B1 U6.B4
FMC_NE1: U4.E4 U6.C11
FMC_NOE: U4.E2 U6.A12
FMC_NWAIT: U4.D1 U6.B11
FMC_NWE: U4.D3 U6.A11
FPGA_CLK: U4.G4 U6.E15
FPGA_DONE: U4.P9 U6.U6
FPGA_INIT_B: R31.1 U4.P8 U6.U7
FPGA_PROG_B: R32.1 U4.L7 U6.R12
I2C_SCL: J1.A8 U6.P14
I2C_SDA: J1.A9(SDA) U6.R14
INT0: J1.B38 U4.P12
INT1: J1.B30 U4.K11
INT2: J1.B24 U4.H12
INT3: J1.B15 U4.E11
INT4: J1.A15 U4.C14
INT5: J1.A24 U4.F14
INT6: J1.A30 U4.J13
INT7: J1.A36 U4.P13
LED_LINK: J2.14 R1.2
LED_SPD: J2.11 R2.2
MISO0: J1.B34 U4.M12
MISO1: J1.B26 U4.J12
MISO2: J1.B18 U4.F11
MISO3: J1.B11 U4.C12
MISO4: J1.A11 U4.A13
MISO5: J1.A18 U4.D14
MISO6: J1.A26 U4.H14
MISO7: J1.A33 U4.M14
MOSI0: J1.B33 U4.M11
MOSI1: J1.B25 U4.H11
MOSI2: J1.B16 U4.E12
MOSI3: J1.B10 U4.C10
MOSI4: J1.A10 U4.A12
MOSI5: J1.A16 U4.D13
MOSI6: J1.A25 U4.G14
MOSI7: J1.A31 U4.L13
PRSNT: J1.A1 U6.E2
RESET: J5.10 U6.K1
RMII_CRS_DV: U2.40 U6.R5
RMII_MDC: U2.31 U6.M2
RMII_MDIO: U2.30 U6.N3
RMII_REF_CLK: U2.25 U6.N4
RMII_RX_ER: U2.41 U6.P11
RMII_RXD0: U2.43 U6.T4
RMII_RXD1: U2.44 U6.U4
RMII_TX_EN: U2.2 U6.P12
RMII_TXD0: U2.3 U6.T14
RMII_TXD1: U2.4 U6.U14
SCK0: J1.B35 U4.N11
SCK1: J1.B28 U4.J11
SCK2: J1.B21 U4.F12
SCK3: J1.B13 U4.D10
SCK4: J1.A13 U4.B13
SCK5: J1.A21 U4.E13
SCK6: J1.A28 U4.H13
SCK7: J1.A34 U4.M13
SD_CARD_DET: J6.10 U6.J14
SD_CS: J6.1 U6.A16
SD_MISO: J6.7 U6.B15
SD_MOSI: J6.2 U6.C14
SD_SCK: J6.5 U6.A15
SD_WP_DET: J6.11(WP_DET) U6.J15
SW1: L1.1 U7.26
SW2: L2.1 U7.23
SW3: L3.1 U7.21(SW3)
UART_DTR: U6.N6 U10.17
UART_STM_CTS: U6.T15 U10.15
UART_STM_RTS: U6.U15 U10.16
UART_STM_RX: U6.B13 U10.13
UART_STM_TX: U6.A13 U10.14
VPHY: C84.1 FB1.2 U10.3
VPLL: C85.1 FB2.2 U10.8
N21610: R18.2 U7.8
N21618: R19.2 U7.3
N25488: J4.4 U4.M6
N25492: J4.8 U4.P6
N25504: J4.10 U4.P7
N25516: J4.6 U4.A7
N233110: J2.1 R3.1 U2.17
N233158: R1.1 R34.2 U2.28
N233162: R2.1 R35.1 U2.27
N233448: R6.1 U2.24
N233488: R4.2 U2.21
N233492: R5.2 U2.20
N233698: J2.2 R7.2 U2.16
N233790: J2.3 R8.1 U2.14
N233818: J2.6 R9.2 U2.13
N233858: U2.34 U9.3
N233942: R10.1 U2.39
N236994: R20.2 U7.30
N257466: C8.2 U6.J2 X2.3
N257498: C9.1 U6.J1 X2.1
N258814: D1.2 R11.1
N333133: C33.1 C34.1 U6.A7 U6.D17 U6.U11
N374940: R25.1 R26.2 U4.M9
N374954: R27.1 R28.2 U4.M8
N374958: R29.1 R30.2 U4.M7
N380752: D2.2 R22.1
N386744: R11.2 U6.D7
N387111: J5.4 U6.B14
N387191: J5.2 U6.C15
N387288: J5.6 U6.C6
N397722: C67.1 C68.1 C69.1 C70.1 U2.18 U2.23(PFBOUT) U2.37
N404101: C71.1 U10.1 X3.3
N404116: C72.2 U10.2 X3.1
N404507: R36.1 U10.43 U11.1
N404532: U10.44 U11.4
N404557: U10.45 U11.5
N404944: R36.2 U11.3
N405790: R37.1 U10.5
N405901: C74.2 U10.37
N406814: C75.1 R38.2 U10.34
N407884: C78.1 U10.38
N417901: R41.1 U10.31
N417908: D4.2 R39.1
N417912: D5.2 R40.1
N418780: D4.1(CATHODE) U10.27
N418787: D5.1(CATHODE) U10.28
N426816: D6.1 J3.2
N426829: D6.3 J3.3
N427030: R43.1 U10.7
N427034: R42.1 U10.6
N427101: D6.6 R42.2
N427113: D6.4 R43.2
N487401: D3.2 R33.2
N487405: R33.1 U4.M10

Pads without a net: J1 A38 A39 A40 A41 A42 A43 A44 A45 A46 A47 A48 A49 B8 B9 B39 B40 B41 B42 B43 B44 B45 B46 B47 B49; J2 7; J4 1 12 14; J5 7 8; J6 8 9; U2 1 5 6 8 9 10 11 12 26 33 38 42 45 46; U4 A10 B8 F7 F8 G7 G8 H7 H8 J7 J8 L5 L12 L14; U6 A2 A3 A4 A8 A9 A10 A14 B3 B7 B8 B9 B10 B16 B17 C1 C2 C5 C7 C8 C9 C12 D4 D5 D6 D10 D11 D12 D14 D15 D16 E1 E3 E4 E10 E13 E14 E16 E17 F1 F2 F3 F4 F13 F14 F15 G2 G15 H1 H2 H3 H17 K2 K3 K4 K14 K16 K17 L2 L3 L4 L16 L17 M3 M4 M14 M16 M17 N2 N5 N13 N14 N15 N17 P2 P3 P5 P6 P13 R1 R2 R3 R6 R13 T1 T2 T3 T5 T6 T7 T13 U2 U3 U5; U7 1 6 12 16 17 19 20 25; U10 18 19 20 21 25 26 29 30 32 33; X2 2 4; X3 2 4

## Via types
v1: diameter 0.508, hole 0.254, TOP to BOTTOM, 270 vias
v2: diameter 0.457, hole 0.254, TOP to BOTTOM, 115 vias
v3: diameter 0.889, hole 0.381, TOP to BOTTOM, 7 vias
v4: diameter 0.762, hole 0.381, TOP to BOTTOM, 122 vias

## Routing (per net, layer and track width the routed paths; a pad name or vN(x,y) marks a point on that pad's centre or on a via; arc(x,y) is an arc through that point)
AVIN1: length 3.5
  TOP w0.203: R12.2 C61.1 48.04,89.7 48.15,89.59 48.15,89.31 47.82,88.98 U7.28
AVIN2: length 4.2
  TOP w0.203: U7.15 48.82,82.41
  TOP w0.406: 48.82,82.41 49.31,81.92 C59.1 R14.2
AVIN3: length 4.1
  TOP w0.203: 47.74,82.46 47.64,82.57 47.64,83.24 47.82,83.43 U7.13
  TOP w0.406: R15.2 C58.1 47.74,82.46
GND: length 358
  TOP w0.152: C69.2 24.21,75.98 24.08,76.11 v1(24.08,76.16) ; C74.1 v4(34.74,61.26) ; U2.47 34.58,77.73 v4(34.24,77.38) ; C6.2 v1(22.81,79.29) ; R34.1 30.56,67.99 v1(30.43,67.86) 30.3,67.99 R35.2 ; C70.2 v1(39.95,72.3) ; v4(33.6,72.94) 33.95,72.59 U2.35 ; U2.15 28.37,77.23 28.52,77.08 28.52,77.07 v4(28.76,77.07) ; v4(34.24,73.57) 34.24,72.99 34.45,72.78 U2.36 ; v1(41.35,69) C5.1 39.84,69.74 U9.2 ; C68.2 v1(24.08,70.4) ; C73.2 v4(26.51,67.22) ; C4.2 21.6,75.92 21.6,76.06 v1(21.54,76.11) ; C75.2 v4(36.89,58.33) ; v4(29.16,74.84) 28.77,75.23 U2.19 ; C80.2 v4(33.08,50.71) ; C2.2 v1(22.68,76.75) ; C76.2 v4(31.06,65.43) ; R6.2 26.75,69.9 v1(26.62,69.77) ; C78.2 v4(33.6,65.43) ; C77.2 v4(32.33,65.43) ; U6.N16 v2(64.41,50.93)
  TOP w0.203: C63.2 56.46,85.71 v4(56.46,86.27) ; v1(46.94,83.1) 46.82,83.21 U7.11 ; R26.1 v1(85.04,50.71) ; U6.J16 v2(61.21,50.93) ; U6.L7 v2(63.48,43.07) ; v2(63.48,46) 63.35,46 U6.L10 ; C88.2 v4(39.95,78.02) ; v4(31.06,59.6) 31.28,59.81 U10.36 ; U4.J6 v1(69.16,67.22) ; C79.2 v4(20.16,52.62) ; v4(75.51,90.08) U8.4 73.76,90.63 72.4,91.99 C66.2 ; D3.1 84.24,58.17 v4(84.4,58.33) ; D2.1 v1(57.73,26.58) ; U4.D5 v1(68.16,73.04) ; v4(28.52,59.6) 28.77,59.85 U10.42 ; U6.B2 v2(55.61,39.07) ; U4.E14 v1(77.98,72.04) ; v2(60.41,46) 60.54,46 U6.H10 ; U6.C16 56.41,50.93 56.41,51.01 v2(56.49,51.01) ; U7.24 50.6,88.02 v1(50.75,88.18) ; U6.J11 v2(61.21,46.93) ; v4(25.98,54.52) 25.69,54.81 U10.11 ; U6.H11 v2(60.41,46.93) ; U4.B7 v1(70.16,75.04) ; U10.23 30.77,54.23 v4(31.06,54.52) ; U6.C13 v2(56.41,48.53) ; U6.P1 v2(65.88,38.27) ; v1(72.93,63.16) 72.93,63.27 U4.N9 ; v4(29.79,54.52) 30.28,54.04 U10.22 ; U4.H9 v1(72.98,68.22) ; U4.K7 v1(70.16,66.22) ; U6.A17 v2(54.81,51.73) ; U6.J10 61.34,46 v2(61.21,46) ; v1(44.4,88.18) 44.4,88.09 44.97,87.52 U7.2 ; U6.N1 v2(65.08,38.27) ; U6.H8 v2(60.41,43.87) ; U6.H7 v2(60.41,43.07) ; v4(31.06,58.33) 31.06,58.63 31.75,59.31 U10.35 ; U7.22 50.63,87.02 v1(50.75,86.91) ; U4.N3 v1(66.16,63.22) ; C71.2 v4(19,65.95) ; U4.E8 v1(71.98,72.04) ; U4.C6 v1(69.16,74.04) ; U4.E6 v1(69.16,72.04) ; U6.K7 v2(62.68,43.07) ; U4.A9 v1(72.98,76.04) ; U10.10 25.3,55.31 25.43,55.44 26.42,55.44 v4(26.66,55.2) ; U7.7 v1(44.42,85.02) ; U4.G12 v1(75.98,70.04) ; U6.H9 v2(60.41,45.33) ; v4(50.75,82.46) 50.92,82.3 C59.2 ; v1(68.21,63.16) 68.21,63.27 U4.N5 ; U4.L6 v1(69.16,65.22) ; U6.G16 v2(59.61,50.93) ; U4.C8 v1(71.98,74.04) ; C67.2 v4(41.86,73.27) ; U4.A6 69.21,75.99 v1(69.21,76.1) ; J6.14 8.5,46.56 v4(8.84,46.9) ; U6.J17 v2(61.21,51.73) ; J6.13 v4(27.15,43.2) ; C90.2 v1(26.15,79.6) ; v1(64.1,71.99) 64.21,71.99 U4.E1 ; U4.C2 65.21,73.99 v1(65.1,73.99) ; U4.L11 v1(74.98,65.22) ; U6.R8 v2(66.68,43.87) ; U4.F5 v1(68.16,71.04) ; C81.2 25.04,61.31 U10.48 25.77,59.81 v4(25.98,59.6) ; U4.L8 v1(71.98,65.22) ; U6.M15 v2(64.28,50.13) ; U6.U17 v2(68.28,51.73) ; U6.A1 v2(54.81,38.27) ; v1(44.4,91.99) 44.53,91.86 R16.2 ; U6.J3 v2(61.21,39.87) ; U6.K9 v2(62.68,45.33) ; U6.J9 v2(61.21,45.33) ; U4.C7 v1(70.16,74.04) ; C65.2 57.1,80.56 v4(56.46,81.19) ; U6.G9 v2(59.61,45.33) ; D1.1 51.22,44.53 50.75,45 v1(50.75,45.24) ; C54.2 56.46,91.05 v4(56.46,91.5) ; U11.2 27.37,64.68 27.85,65.17 27.85,66.76 C73.2 ; U6.G10 59.74,46 v2(59.61,46) ; C1.2 v1(22.72,72.94) ; U10.41 29.28,60.12 v4(29.79,59.6) ; R24.2 v1(44.4,80.56) ; U10.9 25.37,55.81 v4(25.98,56.43) ; U6.L11 v2(63.48,46.93) ; U4.A14 v1(77.98,76.04) ; U4.K1 v1(64.16,66.22) ; U4.P1 v1(64.16,62.22) ; U4.K5 v1(68.16,66.22) ; U6.G8 v2(59.61,43.87) ; U4.E3 v1(66.16,72.04) ; D6.2 v4(15.19,57.06) ; U6.R4 v2(66.68,40.67) ; C85.2 v4(20.16,55.16) ; U6.K8 v2(62.68,43.87) ; U4.B10 v1(73.98,75.04) ; v1(23.44,71.03) 24.08,71.67 C87.2 ; U6.U1 v2(68.28,38.27) ; U4.C13 v1(76.98,74.04) ; U4.G6 v1(69.16,70.04) ; U4.P14 v1(77.98,62.22) ; R28.1 v1(83.77,50.71) ; U6.K15 v2(62.68,50.13) ; U6.T12 v2(67.48,47.73) ; U4.N12 v1(75.98,63.22) ; U4.A11 74.93,75.99 v1(74.93,76.1) ; U4.B9 v1(72.98,75.04) ; R30.1 v1(82.5,50.71) ; U4.E10 v1(73.98,72.04) ; C83.2 v4(19.11,53.89) ; v4(8.81,14.52) 8.5,14.83 J6.15 ; C61.2 v4(50.75,90.72) ; R37.2 v4(20.16,58.97) ; U6.L15 v2(63.48,50.13) ; U6.C10 v2(56.41,46.13) ; U4.L10 v1(73.98,65.22) ; U4.K9 v1(72.98,66.22) ; J6.12 10.95,46.06 v4(10.74,46.27) ; v4(27.25,59.6) 26.96,59.6 26.28,60.29 U10.47 ; J6.16 v4(27.15,14.62) ; U6.K10 62.55,46 v2(62.68,46) ; U4.J10 v1(73.98,67.22) ; U6.L8 v2(63.48,43.87) ; U4.B4 v1(67.16,75.04) ; U4.H5 v1(68.16,68.22) ; U4.G10 v1(73.98,70.04) ; U7.18 v1(50.73,85.02) ; U4.D11 v1(74.98,73.04) ; U6.E8 v2(58.01,43.87) ; U6.K11 v2(62.68,46.93) ; U6.L9 v2(63.48,45.33) ; C9.2 v1(64.08,32.3) ; C72.1 v4(15.82,65.32) ; U4.K14 v1(77.98,66.22) ; U4.L4 v1(67.16,65.22) ; C8.1 v1(67.89,33.57) ; U4.D7 v1(70.16,73.04) ; U4.A1 v1(64.16,76.04) ; U6.B6 v2(55.61,42.27) ; U6.G11 v2(59.61,46.93) ; C84.2 v1(20.18,60.24) ; U4.F9 v1(72.98,71.04) ; U6.G7 v2(59.61,43.07) ; C89.2 v4(32.33,67.22) ; U4.D9 v1(72.98,73.04) ; U6.J7 v2(61.21,43.07) ; U4.G3 v1(66.16,70.04) ; U6.J8 v2(61.21,43.87) ; R21.2 v1(41.86,86.91) ; U4.C9 v1(72.98,74.04) ; U10.4 v4(25.96,58.31)
  TOP w0.305: C22.2 v4(72.71,39.45) ; J6.6 35.13,36.98 v4(35.51,37.37) ; v4(35.51,29.76) 35.23,29.48 J6.3 ; C45.2 v4(83.04,69.89) ; J1.A12 92.43,80.33 92.28,80.18 92.15,80.18 v4(92.02,80.05) ; C86.1 v4(39.95,27.85) ; C46.2 v4(83.67,62.78) ; C82.2 39.5,61.84 40.44,62.78 v4(40.59,62.78) ; C52.2 v4(58.54,65.06) ; v4(58.16,70.59) 57.98,70.4 C51.2 ; C39.2 v4(65.9,59.98) ; C40.2 v4(79.06,58.17)
  TOP w0.406: v4(92.02,55.16) 92.74,55.16 92.91,55.33 J1.A37 ; v4(92.02,75.48) 92.74,75.48 92.89,75.33 J1.A17 ; J1.A27 v4(92.03,65.33) ; C55.2 v4(50.11,93.89) ; J1.A7 92.24,87.33 v4(92.02,87.54) ; C56.2 v4(51.38,78.02) ; J1.A32 v4(92.11,60.33) ; C58.2 v1(45.03,81.19) ; C57.2 v4(45.67,78.02) ; v4(34.91,90.68) C60.2 v4(38.65,90.68) ; J1.A2 93.08,92.33 92.78,92.62 v4(92.02,92.62) ; C62.2 v4(59,84.62) ; J1.A22 v4(92.1,70.33) ; C64.2 v4(59,79.29) ; C53.2 v4(59,89.7)
  GND w0.203: J4.3 79.69,36.85 ; J4.3 80.62,35.92 ; J4.3 79.69,34.99 ; J4.3 78.76,35.92 ; 46.89,29.76 J5.3 ; 8.84,48.63 J3.6 ; J3.6 10.62,50.41 ; J3.6 7.06,50.41 ; J3.6 8.84,52.19 ; J4.11 80.62,43.92 ; J4.11 79.69,44.85 ; J4.11 78.76,43.92 ; J4.11 79.69,42.99 ; 2.96,71.7 J2.12 ; J2.12 3.94,70.73 ; J2.12 4.92,71.7 ; J2.12 3.94,72.68 ; 8.84,60.67 J3.5 ; J3.5 10.62,62.45 ; J3.5 7.06,62.45 ; J3.5 8.84,64.23 ; 10.41,67.71 J2.10 ; J2.10 11.89,66.24 ; J2.10 13.37,67.71 ; J2.10 11.89,69.19 ; 79.69,36.99 J4.5 ; J4.5 79.69,38.85 ; J4.5 78.76,37.92 ; J4.5 80.62,37.92 ; 17.72,70.07 J2.8 ; J2.8 18.7,71.05 ; J2.8 16.74,71.05 ; J2.8 17.72,72.03 ; 5.46,78.3 J2.13 ; J2.13 5.46,80.25 ; J2.13 4.48,79.27 ; J2.13 6.44,79.27 ; J4.7 80.62,39.92 ; J4.7 79.69,40.85 ; J4.7 79.69,38.99 ; J4.7 78.76,39.92 ; J4.9 80.62,41.92 ; J4.9 78.76,41.92 ; J4.9 79.69,42.85 ; J4.9 79.69,40.99 ; 11.89,81.79 J2.9 ; J2.9 13.37,83.27 ; J2.9 10.41,83.27 ; J2.9 11.89,84.74 ; 11.55,54.3 J3.4 ; J3.4 11.55,56.06 ; J3.4 10.67,55.18 ; J3.4 12.43,55.18 ; 46.89,25.95 J5.9 47.57,25.26 ; 46.89,28.49 J5.5 ; 79.69,44.99 J4.13 ; J4.13 79.69,46.85 ; J4.13 78.76,45.92 ; J4.13 80.62,45.92
  BOTTOM w0.102: 72.58,61.63 72.93,61.98 v1(72.93,63.16) ; 68.54,61.63 68.21,61.96 v1(68.21,63.16)
  BOTTOM w0.203: v2(61.21,43.07) 61.04,42.9 C18.2 ; v1(77.98,62.22) 78.32,62.56 78.34,62.56 C43.2 ; v1(64.16,62.22) 63.82,62.56 63.55,62.56 C49.2 ; C20.2 56.38,39.07 v2(55.61,39.07) ; C48.2 62.23,66.76 63.09,66.76 63.63,66.22 v1(64.16,66.22) 64.16,66.97 64.41,67.22 C25.2 ; v1(66.16,70.04) 65.58,69.46 63.5,69.46 C47.2 ; C16.2 59.01,47.53 v2(59.61,46.93) ; C28.2 68.77,65.22 v1(69.16,65.22) ; C21.2 65.35,38.54 v2(65.08,38.27) ; C32.2 56,42.65 v2(55.61,42.27) ; C23.2 69.78,69.9 69.64,70.04 v1(69.16,70.04) ; v2(64.28,50.13) 64.46,49.95 C14.2 ; C33.2 56,45.71 v2(56.41,46.13) ; v2(59.61,45.33) 59.61,45.24 C12.2 ; C30.2 73.11,68.35 v1(72.98,68.22) ; C19.2 63.08,42.67 v2(62.68,43.07) ; C10.2 61.04,47.1 v2(61.21,46.93) ; C34.2 56.49,50.53 v2(56.49,51.01) ; v2(63.48,46.93) 63.08,47.33 C11.2 ; C41.2 75.98,69.56 v1(75.98,70.04) ; C15.2 63.48,45.24 v2(63.48,45.33) ; C27.2 68.03,68.35 v1(68.16,68.22) ; v2(59.61,43.07) 59.01,42.47 C17.2 ; 68.54,61.63 C35.2 ; 72.58,61.63 C36.2 ; C31.2 71.95,65.22 v1(71.98,65.22) ; C26.2 66.09,72.04 v1(66.16,72.04) ; v1(77.98,66.22) 77.98,66.09 78.42,65.65 79.23,65.65 79.78,66.21 C42.2 ; v2(54.81,51.73) 54.81,51.69 C13.2 ; v1(72.98,71.04) 72.34,70.4 72.21,70.4 C29.2 ; v1(70.16,66.22) U4.K7 C24.2
  BOTTOM w0.305: v4(92.02,80.05) 92.15,80.18 92.28,80.18 92.43,80.33 J1.A12
  BOTTOM w0.406: J1.A7 92.95,87.33 92.74,87.54 v4(92.02,87.54) ; J1.B31 93.11,61.33 v4(92.11,60.33) J1.A32 ; J1.A22 v4(92.1,70.33) ; J1.A2 92.32,92.33 v4(92.02,92.62) 92.73,93.33 J1.B1 ; J1.B17 92.89,75.33 92.74,75.48 v4(92.02,75.48) ; J1.B48 v4(92.06,44.33) ; J1.A37 92.19,55.33 v4(92.02,55.16) ; J1.A27 v4(92.03,65.33)
  vias: v1(46.49,87.36) v1(46.49,86.27) v1(46.49,85.19) v1(47.57,87.36) v1(47.57,86.27) v1(47.57,85.19) v1(48.66,87.36) v1(48.66,86.27) v1(48.66,85.19) v3(62.81,89.45) v4(57.73,91.5) v4(57.73,86.27) v4(57.73,81.19)
VBUS: length 29.5
  TOP w0.203: D6.5 18.25,57.06 17.73,56.54 v4(17.73,55.16) 17.23,54.66 C83.1 ; R41.2 36.32,57.37 v4(36.78,57.37)
  TOP w0.305: C83.1 14.84,53.89 J3.1
  BOTTOM w0.203: v4(36.78,57.37) 19.94,57.37 v4(17.73,55.16)
VCC_1V0: length 36.5
  TOP w0.203: U4.J9 v1(72.98,67.22) ; R23.1 v1(43.13,80.56) ; v3(56.46,83.79) 56.46,83.28 C65.1 ; U4.G9 v1(72.98,70.04) ; U4.H6 v1(69.16,68.22) ; U4.E9 v1(72.98,72.04) ; U4.K6 v1(69.16,66.22) ; U4.K8 v1(71.98,66.22) ; U4.E5 v1(68.16,72.04) ; U4.G5 v1(68.16,70.04) ; U4.E7 v1(70.16,72.04) ; U4.D8 v1(71.98,73.04) ; U4.D6 v1(69.16,73.04) ; U4.J5 v1(68.16,67.22) ; v1(45.67,83.1) 45.82,83.25 U7.9 ; U4.F6 v1(69.16,71.04)
  TOP w0.406: C64.1 58.35,82.64 C65.1 55.97,82.64 55.79,82.46 L3.2
  PWR w0.305: 53.92,83.73 46.3,83.73 v1(45.67,83.1) v1(43.13,80.56)
  BOTTOM w0.203: C28.1 69.85,64.69 69.85,65.53 v1(69.16,66.22) ; C26.1 67.26,72.94 v1(68.16,72.04) ; C27.1 68.46,69.7 68.46,69.74 v1(68.16,70.04) ; C25.1 67.67,67.22 67.68,67.22 v1(68.16,67.22) ; C23.1 69.78,70.9 69.64,71.04 v1(69.16,71.04) ; v1(71.98,66.22) U4.K8 C24.1
  vias: v4(57.73,83.79)
VCC_1V8: length 29.4
  TOP w0.203: v3(56.46,89.13) 56.46,88.61 C63.1 ; U4.L9 v1(72.98,65.22) ; U7.4 44.75,86.52 v1(44.4,86.87) ; U4.K10 v1(73.98,66.22) ; U4.H10 v1(73.98,68.22) ; U4.F10 v1(73.98,71.04)
  TOP w0.305: v1(41.86,85.64) R17.1
  TOP w0.406: C62.1 58.75,87.33 58.35,87.72 57.35,87.72 C63.1 56.77,87.98 56.04,87.24 56.04,86.92 55.65,86.53 L2.2
  PWR w0.305: v1(41.86,85.64) 43.09,86.87 v1(44.4,86.87) 46.34,88.81 52.02,88.81 53.29,87.54 53.92,87.54
  BOTTOM w0.102: 73.41,71.61 72.41,71.61
  BOTTOM w0.203: v1(73.98,71.04) 73.41,71.61 ; C30.1 74.11,68.35 v1(73.98,68.22) ; v1(72.98,65.22) 72.51,64.74 C31.1 ; 72.41,71.61 C29.1
  vias: v4(57.73,89.11)
VCC_3V3: length 175.3
  TOP w0.152: R10.2 v1(39.94,73.57) ; R5.1 v1(23.44,74.21) ; v1(41.35,67.99) C5.2 39.84,67.24 U9.1 ; C73.1 v4(29.27,67.22) ; U6.M1 v2(63.61,38.93) ; R38.1 v4(36.89,59.6) ; R4.1 24.21,73.44 24.08,73.57 23.44,73.57 23.44,73.58 v1(23.45,73.58)
  TOP w0.203: U6.M13 v2(64.28,48.53) ; 70.66,89.32 70.66,87.79 69.79,86.92 ; 70.66,89.32 70.66,89.69 70.57,89.78 C66.1 ; 70.66,89.32 71.57,89.32 v4(71.7,89.45) ; U10.46 26.77,62.62 v1(26.62,62.78) 26.14,62.78 26,62.65 C81.1 ; U6.H13 v2(60.41,48.53) ; U6.K5 v2(62.68,41.47) ; U6.P17 v2(65.88,51.73) ; R22.2 v1(64.72,26.58) ; FB2.1 v4(20.16,53.89) ; 68.38,86.27 69.14,86.27 69.79,86.92 ; U6.N10 64.95,46 v2(65.08,46) ; U6.U12 v2(68.28,47.73) ; U4.N2 v1(65.16,63.22) ; U6.G13 v2(59.61,48.53) ; U8.7 69.16,87.54 69.79,86.92 ; 21.04,72.38 C1.1 R7.1 ; 21.04,72.38 21.47,72.38 v1(21.54,72.3) ; 21.04,72.38 R3.2 ; R25.2 v1(85.04,55.16) ; U11.6 28.94,65.63 28.39,66.18 C73.1 ; R40.2 v4(38.68,57.18) ; R27.2 v1(83.77,55.16) ; U6.F5 v2(58.81,41.47) ; U6.G17 v2(59.61,51.73) ; 21.04,78.68 C6.1 R9.1 ; 21.04,78.68 R8.2 ; 21.04,78.68 v1(20.29,78.68) ; R39.2 39.2,53.76 v4(39.7,53.25) ; v4(30.43,50.71) C80.1 31.2,51.22 31.28,51.29 U10.24 ; C90.1 v1(24.55,79.6) ; U4.G2 v1(65.16,70.04) ; U2.32 32.45,69.64 32.33,69.52 C89.1 33.47,69 v4(33.6,69.13) ; U4.N6 v1(69.16,63.22) ; U6.N8 v2(65.08,43.87) ; U8.3 v4(75.51,88.81) ; R31.2 v1(78.69,53.25) ; v4(30.28,64.01) 30.6,64.01 C76.1 29.77,62.26 U10.40 ; v2(65.08,47.06) 65.08,46.93 U6.N11 ; U10.39 30.28,62.32 30.79,62.83 31.62,62.83 C77.1 32.33,63.14 v4(32.66,62.81) ; C54.1 56.46,93.95 v3(56.46,94.53) ; FB1.1 v4(17.62,60.24) ; v2(65.08,47.74) 65.08,47.73 U6.N12 ; U6.B1 v2(55.61,38.27) ; U4.N7 70.21,63.27 v1(70.21,63.16) ; v1(25.35,71.03) 25.22,71.17 C87.1 25.9,72.36 25.9,73.16 26.48,73.73 U2.22 ; U6.C17 v2(56.41,51.73) ; U4.G13 v1(76.98,70.04) ; U6.E11 v2(58.01,46.93) ; U4.K2 v1(65.16,66.22) ; U2.48 37.47,78.23 37.68,78.02 C88.1 38.18,77.52 38.04,77.38 v4(38.04,76.76) ; U4.K13 v1(76.98,66.22) ; U6.A6 v2(54.81,42.27) ; U6.M5 v2(64.27,41.48) ; U7.31 46.33,89.92 46.86,90.45 46.86,91.3 R13.1 v1(46.3,92.62) ; U6.L13 v2(63.48,48.53) ; U6.J13 v2(61.21,48.53) ; U6.L5 v2(63.48,41.47) ; C4.1 v4(20.27,75.48) ; R32.2 v1(77.42,53.25) ; U6.E7 v2(58.01,43.07) ; R29.2 v1(82.5,55.16) ; v4(36.78,65.95) 37.05,66.22 U9.4 ; U4.N13 v1(76.98,63.22) ; U6.K13 v2(62.68,48.53) ; v4(22.17,51.35) 22.04,51.48 C79.1 22.96,52.62 24.28,53.94 U10.12 ; U6.E9 v2(58.01,45.33) ; U6.F17 v2(58.81,51.73) ; U6.E6 v2(58.01,42.27) ; C2.1 v4(20.27,76.75) ; U6.G5 v2(59.61,41.47) ; U4.N8 v1(71.98,63.22) ; U6.L1 v2(63.48,38.27) ; U6.H5 v2(60.41,41.47) ; U6.N7 v2(65.08,43.07)
  TOP w0.305: J6.4 35.2,31.98 v4(35.51,32.3) ; v4(54.66,70.59) 54.84,70.4 C51.1 ; v4(35.51,62.78) 35.65,62.78 36.6,61.84 C82.1 ; v1(46.3,92.62) 45.34,92.62 45.03,92.93 45.03,93.89 46.3,95.16 53.29,95.16 53.92,94.53 v3(56.46,94.53) ; C46.1 v4(80.06,62.78) ; C40.1 v4(77.05,59.77) ; C86.2 v4(39.95,32.93) ; C39.1 v4(64.3,59.98) ; C45.1 v4(79.42,69.89) ; C22.1 v4(72.71,37.85) ; C52.1 v4(56.93,65.06)
  TOP w0.406: L1.2 55.03,92.62 55.71,93.31 C54.1 57.1,93.21 57.51,92.8 58.35,92.8 58.75,92.41 C53.1
  PWR w0.203: 76.76,33.92 J4.2 ; J4.2 77.69,32.99 ; J4.2 77.69,34.85 ; J4.2 78.62,33.92 ; 17.72,75.15 J2.4 ; J2.4 17.72,77.11 ; J2.4 16.74,76.13 ; J2.4 18.7,76.13 ; J2.5 15.18,75.84 ; J2.5 14.2,74.86 ; J2.5 16.16,74.86 ; J2.5 15.18,73.88 ; 47.57,31.72 J5.1 46.89,31.03
  PWR w0.305: v1(46.3,92.62) 49.81,92.62 50.45,93.26 54.56,93.26
  BOTTOM w0.203: C19.1 64.08,41.67 v2(64.27,41.48) ; C32.1 54.39,42.69 v2(54.81,42.27) ; C35.1 69.16,62.73 69.16,62.74 v1(69.16,63.22) ; v2(55.61,38.27) 56.35,38.27 C20.1 ; C18.1 62.05,42.1 v2(62.68,41.47) ; C13.1 56.22,51.93 v2(56.41,51.73) ; v1(65.16,63.22) 64.68,63.22 64.62,63.16 C49.1 ; C42.1 78.3,66.74 77.78,66.74 77.63,66.58 77.35,66.58 v1(76.98,66.22) ; v2(64.28,48.53) 64.69,48.94 C14.1 ; C41.1 76.98,69.56 v1(76.98,70.04) ; C16.1 60.01,48.13 v2(60.41,48.53) ; C48.1 63.18,65.71 64.65,65.71 v1(65.16,66.22) ; C12.1 58.18,45.5 v2(58.01,45.33) ; v1(76.98,63.22) 77.88,63.22 C43.1 ; v2(63.61,38.93) 63.71,39.03 C21.1 ; C11.1 64.08,47.93 v2(63.48,48.53) ; C36.1 71.96,62.71 71.98,62.74 v1(71.98,63.22) ; C17.1 60.01,41.87 v2(60.41,41.47) ; C10.1 62.05,47.9 v2(62.68,48.53) ; v1(65.16,70.04) 64.68,70.04 64.65,70.02 C47.1 ; C15.1 64.44,45.5 64.95,46 v2(65.08,46)
  vias: v4(57.73,94.53)
VCC_5V0: length 27.9
  TOP w0.203: U7.29 47.33,89.2 v1(47.57,89.45) ; v1(48.78,89.52) 48.78,89.39 48.33,88.93 U7.27 ; C55.1 48.66,92.97 R12.1 ; R20.1 46.44,93.89 v4(47.57,93.89) ; R19.1 v1(41.86,88.18) ; U7.14 48.33,83.21 v1(48.21,83.1) ; R18.1 v1(41.86,84.37)
  TOP w0.406: v4(34.91,85.68) C60.1 v4(38.65,85.68) ; C55.1 v4(47.57,93.89) ; R14.1 50.92,79.33 49.93,78.35 C56.1 49.48,78.02 v4(48.84,78.65) ; v4(48.21,77.38) 47.57,78.02 C57.1 47.12,78.94 R15.1
  TOP w0.61: J1.A3 v4(92.05,91.33)
  PWR w0.305: 46.33,89.96 46.3,89.98
  BOTTOM w0.61: J1.A3 v4(92.05,91.33)
  vias: v4(90.78,91.33) v4(90.75,90.08) v4(92.02,90.08)
CFG_CLK: length 75.9
  TOP w0.102: U4.A8 71.57,76.63 ; 68.54,46.92 68.54,46.92 67.46,46.92 U6.T11
  TOP w0.152: U8.6 64.72,88.81 61.88,85.97 61.88,80.98 62.78,80.08 69.44,80.08 71.07,78.45 v1(71.07,77.38) 71.57,76.88 71.57,76.63 ; 68.54,46.92 69.01,47.39 70.28,47.39 70.64,47.74 70.64,51.91 70,52.55 70,53.66 66.95,56.72 63.07,56.72 61.75,58.04 v1(61.75,58.97)
  BOTTOM w0.152: v1(71.07,77.38) 64.08,77.38 58.77,72.07 58.77,66.77 61.75,63.8 v1(61.75,58.97)
CFG_CS: length 89.3
  TOP w0.102: v1(68.53,39.8) 66.17,39.8 65.95,40.02 65.95,40.6 U6.P4
  TOP w0.152: U8.1 73.76,84.85 v4(74.88,83.73) ; U4.C11 v2(75.09,74.15)
  BOTTOM w0.102: v2(75.09,74.15) 74.49,74.75 74.49,75.87 73.73,76.63 ; 68.54,39.8 v1(68.53,39.8)
  BOTTOM w0.152: 72.34,78.02 73.73,76.63 ; 72.34,78.02 71.7,78.65 63.45,78.65 57.1,72.3 57.1,67.58 60.91,63.77 60.91,57.7 62.18,56.43 74.93,56.43 75.36,56 75.36,46.96 73.61,45.2 73.61,42.46 70.95,39.8 68.54,39.8 ; 72.34,78.02 74.88,80.56 v4(74.88,83.73)
CFG_MISO: length 72.8
  TOP w0.102: U6.U13 68.54,48.2 ; 75,76.63 75.1,76.53 75.11,76.53 75.36,76.27 75.36,75.92 75.22,75.78 75.22,74.98 U4.B12
  TOP w0.152: 75,76.63 v1(71.7,79.92) ; 68.54,48.2 69.8,48.2 70.03,48.43 70.03,51.66 69.39,52.3 69.39,53.41 66.7,56.1 62.56,56.1 60.43,58.23 v1(60.43,60.24) ; U8.2 72.34,87.54 71.7,86.91 v4(71.7,83.73)
  BOTTOM w0.152: v4(71.7,83.73) v1(71.7,79.92) 63.13,79.92 53.29,70.08 53.29,65.95 59,60.24 v1(60.43,60.24)
CFG_MOSI: length 74.7
  TOP w0.102: U6.L14 v2(63.48,49.33) ; U4.B11 74.57,75.13 74.22,75.48 74.22,76.63
  TOP w0.152: v1(55.41,62.71) 55.41,58.81 61.24,52.98 61.95,52.98 62.06,52.86 62.07,52.86 v1(62.4,52.54) ; 74.22,76.63 70.29,80.56 v1(63.45,80.56) 62.73,80.56 62.18,81.11 62.18,85.49 64.87,88.18 69.46,88.18 70.33,89.04 70.33,89.56 69.8,90.08 U8.5
  BOTTOM w0.102: v2(63.48,49.33) 62.9,49.33 62.15,50.08 62.15,51.83 62.31,52
  BOTTOM w0.152: v1(55.41,62.71) 52.65,65.46 52.65,70.4 62.81,80.56 v1(63.45,80.56) ; v1(62.4,52.54) 62.4,52.08 62.31,52
CS0: length 25
  TOP w0.152: U4.N10 73.93,63.27 v1(73.93,63.16)
  BOTTOM w0.152: v1(73.93,63.16) 74.39,62.7 76.23,62.7 77.42,61.51 86.31,61.51 91.49,56.33 J1.B36
CS1: length 21.3
  TOP w0.152: U4.K12 v1(75.98,66.22)
  BOTTOM w0.152: J1.B29 92.11,63.33 90.12,65.32 76.88,65.32 v1(75.98,66.22)
CS2: length 22.3
  TOP w0.152: U4.G11 v1(74.98,70.04)
  BOTTOM w0.152: v1(74.98,70.04) 74.98,69.58 75.86,68.7 76.18,68.7 76.36,68.52 92.26,68.52 93.06,69.33 J1.B23
CS3: length 22.3
  TOP w0.152: U4.D12 v1(75.98,73.04)
  BOTTOM w0.152: v1(75.98,73.04) 83.24,73.04 88.52,78.33 J1.B14
CS4: length 19.5
  TOP w0.152: J1.A14 82.81,78.33 79.11,74.63 U4.B14
CS5: length 19.8
  TOP w0.152: J1.A23 90.56,69.33 88.88,71.01 76.95,71.01 U4.F13
CS6: length 19.7
  TOP w0.152: J1.A29 90.21,63.33 85.91,67.63 U4.J14
CS7: length 20.5
  TOP w0.152: U4.N14 84.19,63.63 90.49,57.33 J1.A35
ETH_PWR_DN: length 60.8
  TOP w0.102: U6.A5 54.63,41.8 54.54,41.89
  TOP w0.152: v1(45.67,42.41) 45.67,57.93 45.12,58.48 45.12,75.08 38.1,82.11 32.83,82.11 31.45,80.73 U2.7 ; v1(52.65,42.41) 54.02,42.41 54.54,41.89
  BOTTOM w0.152: v1(52.65,42.41) v1(45.67,42.41)
ETH_RESET: length 54.9
  TOP w0.102: U6.B5 55.54,41.4 54.54,41.4
  TOP w0.152: v1(52.65,41.19) 54.33,41.19 54.54,41.4 ; U2.29 30.95,69.88 v1(31.06,69.76)
  BOTTOM w0.152: v1(52.65,41.19) 37.41,41.19 34.87,43.73 34.87,54.52 37.5,57.15 37.5,62.69 33.85,66.35 31.7,66.35 31.06,66.98 v1(31.06,69.76)
FB1: length 3.8
  TOP w0.152: U7.32 45.82,89.29 45.03,90.08 R16.1
  TOP w0.203: R16.1 R13.2
FB2: length 3
  TOP w0.203: U7.5 44.54,86.02 44.16,85.64 R17.2 R21.1
FB3: length 4.4
  TOP w0.203: U7.10 46.33,83.45 46.3,83.43 46.3,82.91 45.73,82.33 R24.1 R23.2
FMC_A0: length 76.4
  TOP w0.102: 58.74,38 58.74,40.5 58.85,40.6 59.54,40.6 U6.G4 ; 67.57,76.63 U4.A4
  TOP w0.152: 67.57,76.63 67.57,77.86 66.88,78.55 60.86,78.55 59.76,77.46 55.8,77.46 53.87,75.53 48.39,75.53 48.03,75.18 48.03,59.2 47.37,58.54 47.37,41.57 53.11,35.83 57.46,35.83 58.74,37.12 58.74,38
FMC_A1: length 79.1
  TOP w0.102: U6.G3 59.64,39.89 59.64,38 ; U4.B5 68.22,74.98 68.22,76.63
  TOP w0.152: 59.64,38 59.64,37.53 57.58,35.47 53.04,35.47 47.07,41.45 47.07,58.66 47.73,59.32 47.73,75.48 48.08,75.84 53.74,75.84 55.67,77.77 59.64,77.77 60.73,78.86 67.9,78.86 68.22,78.53 68.22,78.53 68.22,76.63
FMC_A2: length 78.5
  TOP w0.102: U4.A5 68.52,75.68 68.52,76.63 ; U6.G1 59.95,38
  TOP w0.152: 59.95,38 59.95,37.05 58.07,35.17 52.91,35.17 46.76,41.32 46.76,58.79 47.42,59.45 47.42,75.73 47.83,76.14 53.62,76.14 55.55,78.07 59.51,78.07 60.6,79.16 68.02,79.16 68.52,78.66 68.52,76.63
FMC_A3: length 85.7
  TOP w0.102: 68.92,76.63 68.92,76.42 68.73,76.22 68.73,75.97 68.92,75.78 68.92,74.48 68.57,74.13 U4.C5 ; U6.H4 60.35,40.6 60.35,38
  TOP w0.152: 60.35,38 60.35,36.82 58.37,34.84 52.81,34.84 46.46,41.19 46.46,58.91 47.12,59.57 47.12,75.86 47.7,76.45 53.49,76.45 55.42,78.38 59.38,78.38 60.48,79.47 68.35,79.47 68.92,78.9 68.92,76.63
FMC_A4: length 88.7
  TOP w0.102: 69.92,76.63 69.92,76.63 69.92,75.48 69.57,75.13 U4.B6 ; U6.J5 v2(61.21,41.47)
  TOP w0.152: 69.92,76.63 69.92,79.17 69.32,79.77 60.35,79.77 59.26,78.68 55.29,78.68 53.36,76.75 47.58,76.75 46.81,75.99 46.81,59.7 46.15,59.04 46.15,41.07 52.68,34.54 58.5,34.54 60.91,36.95 v1(60.91,37.38)
  BOTTOM w0.152: v2(61.21,41.47) 61.65,41.04 61.65,38.12 v1(60.91,37.38)
FMC_A5: length 36
  TOP w0.102: 74.57,61.63 U4.P11 ; 68.54,41.71 68.42,41.71 68.24,41.54 64.91,41.54 64.11,40.73 61.81,40.73 U6.J4
  TOP w0.152: 68.54,41.71 74.77,41.71 76.3,43.25 76.3,59.9 74.57,61.63
FMC_A6: length 30
  TOP w0.102: U6.R7 66.65,43.09 68.54,43.09 ; 73.57,61.63 U4.P10
  TOP w0.152: 68.54,43.09 68.69,43.09 68.84,43.25 75.67,43.25 76,43.58 76,59.2 73.57,61.63
FMC_A7: length 32.1
  TOP w0.102: U6.P7 v2(65.88,43.07) ; U4.M5 68.57,64.13 67.78,63.34 67.78,62.92 67.92,62.78 67.92,61.63
  TOP w0.152: 67.92,61.63 67.92,61.05 71.72,57.26 72.22,57.26 74.58,54.9 v1(74.58,53.25)
  BOTTOM w0.152: v1(74.58,53.25) 74.58,46.6 71.04,43.07 v2(65.88,43.07)
FMC_A8: length 29.4
  TOP w0.102: U6.P8 v2(65.88,43.87) ; 67.22,61.63 67.22,63.28 U4.N4
  TOP w0.152: 67.22,61.63 67.22,60.89 71.46,56.65 71.97,56.65 73.74,54.88 73.74,52.8 73.61,52.67 v1(73.61,51.35)
  BOTTOM w0.152: v1(73.61,51.35) 73.61,46.9 71.07,44.36 66.37,44.36 v2(65.88,43.87)
FMC_A9: length 25.5
  TOP w0.102: U6.R9 v2(66.68,45.33) ; U4.P3 66.57,61.63
  TOP w0.152: 66.57,61.63 66.57,60.68 71.21,56.04 71.71,56.04 73.13,54.62 73.13,53.05 72.8,52.73 v1(72.8,50.08)
  BOTTOM w0.152: v1(72.8,50.08) 72.8,48 70.13,45.33 v2(66.68,45.33)
FMC_A10: length 27.9
  TOP w0.102: 68.57,61.63 U4.P5 ; 68.54,43.86 67.49,43.86 U6.T8
  TOP w0.152: 68.54,43.86 71.83,43.86 75.06,47.08 75.06,54.85 72.35,57.56 71.84,57.56 68.57,60.84 68.57,61.63
FMC_A11: length 26.1
  TOP w0.102: U6.U8 68.54,44.2 ; 67.57,61.63 U4.P4
  TOP w0.152: 67.57,61.63 67.57,60.97 71.59,56.95 72.09,56.95 74.09,54.95 74.09,46.75 71.54,44.2 68.54,44.2
